# Altium PCB VESC_POWER_74mm.PcbDoc
Units mm, origin at the board's own origin, x right, y up, seen from the top; angles counter-clockwise.
Board outline 69 x 54 mm, 4 copper layers (Top Layer, Layer 1, Layer 2, Bottom Layer), stack 1.622 mm thick; 48 components, 17 nets, 111 pads, 1706 vias.
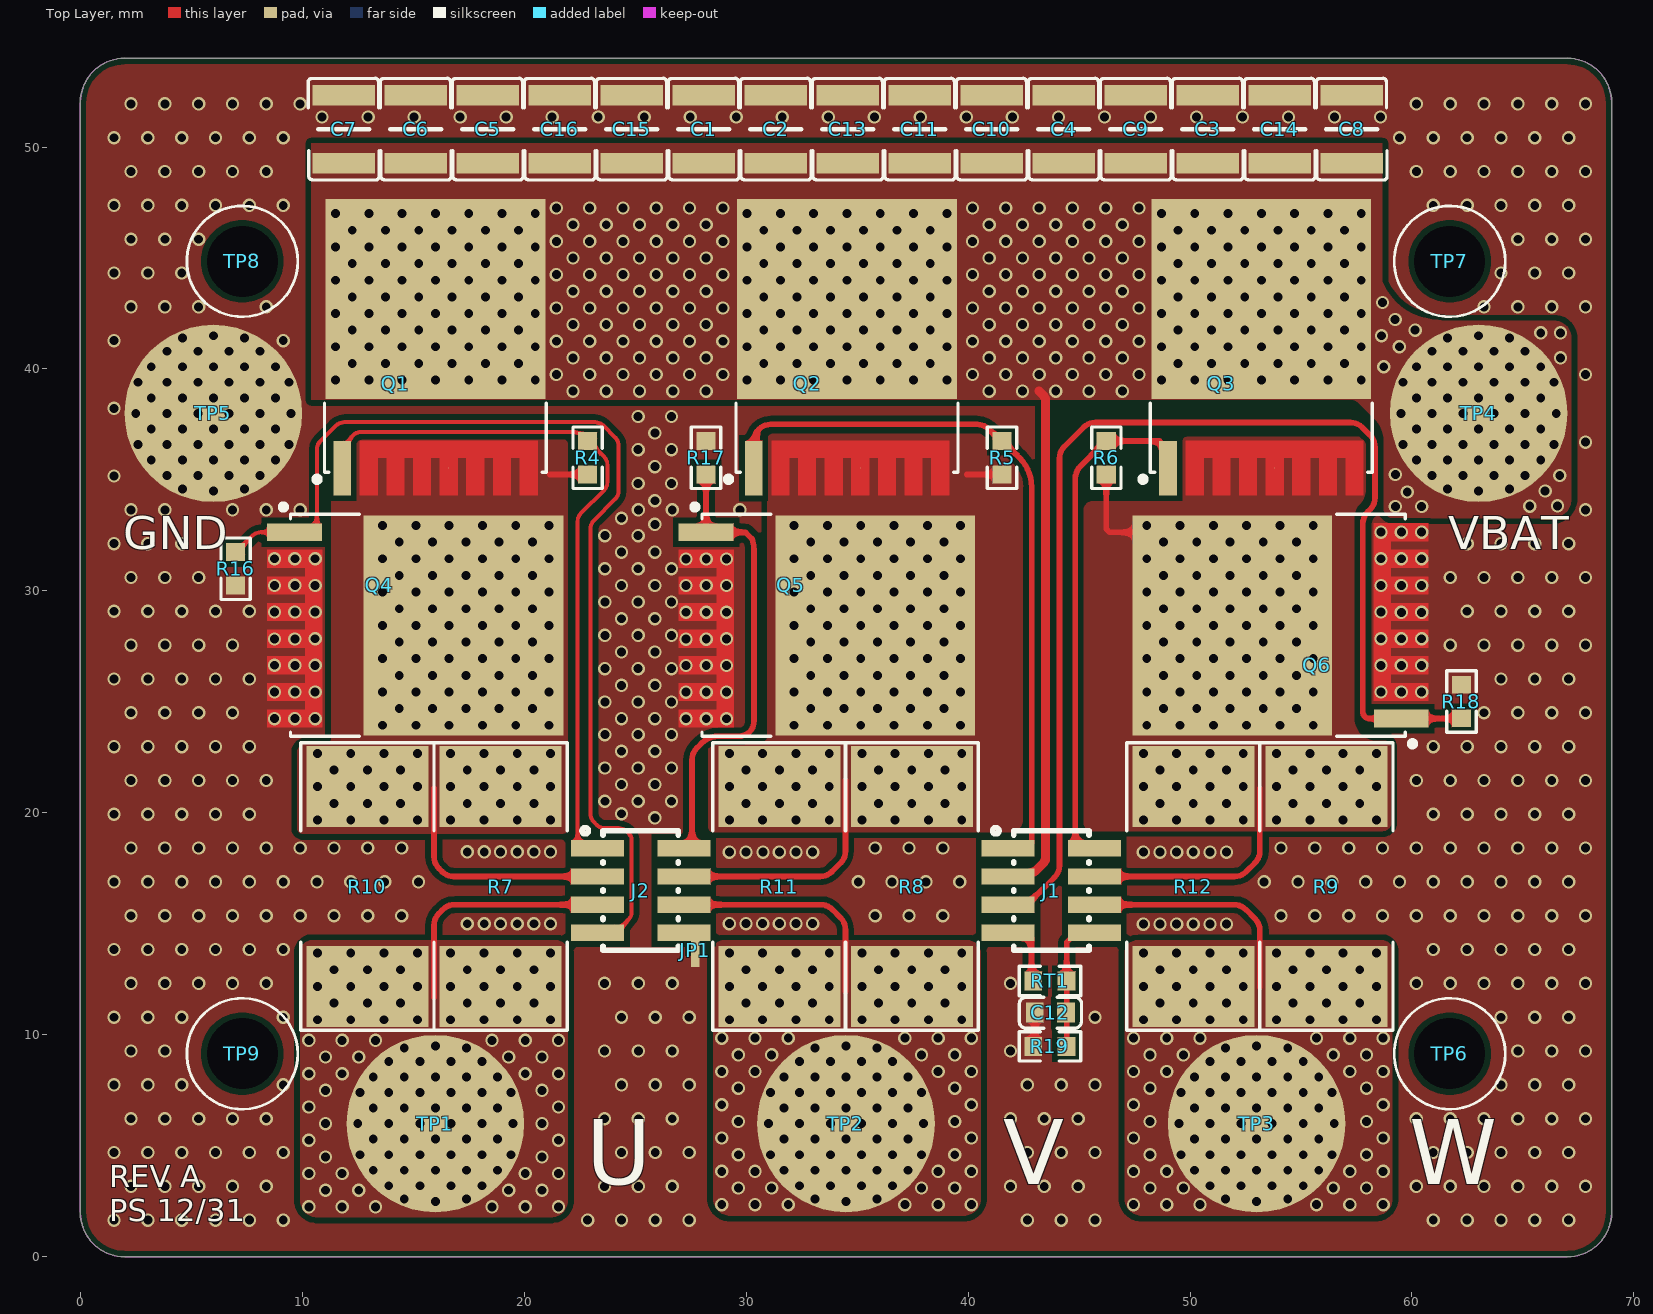
[diagram p0: Top Layer view]
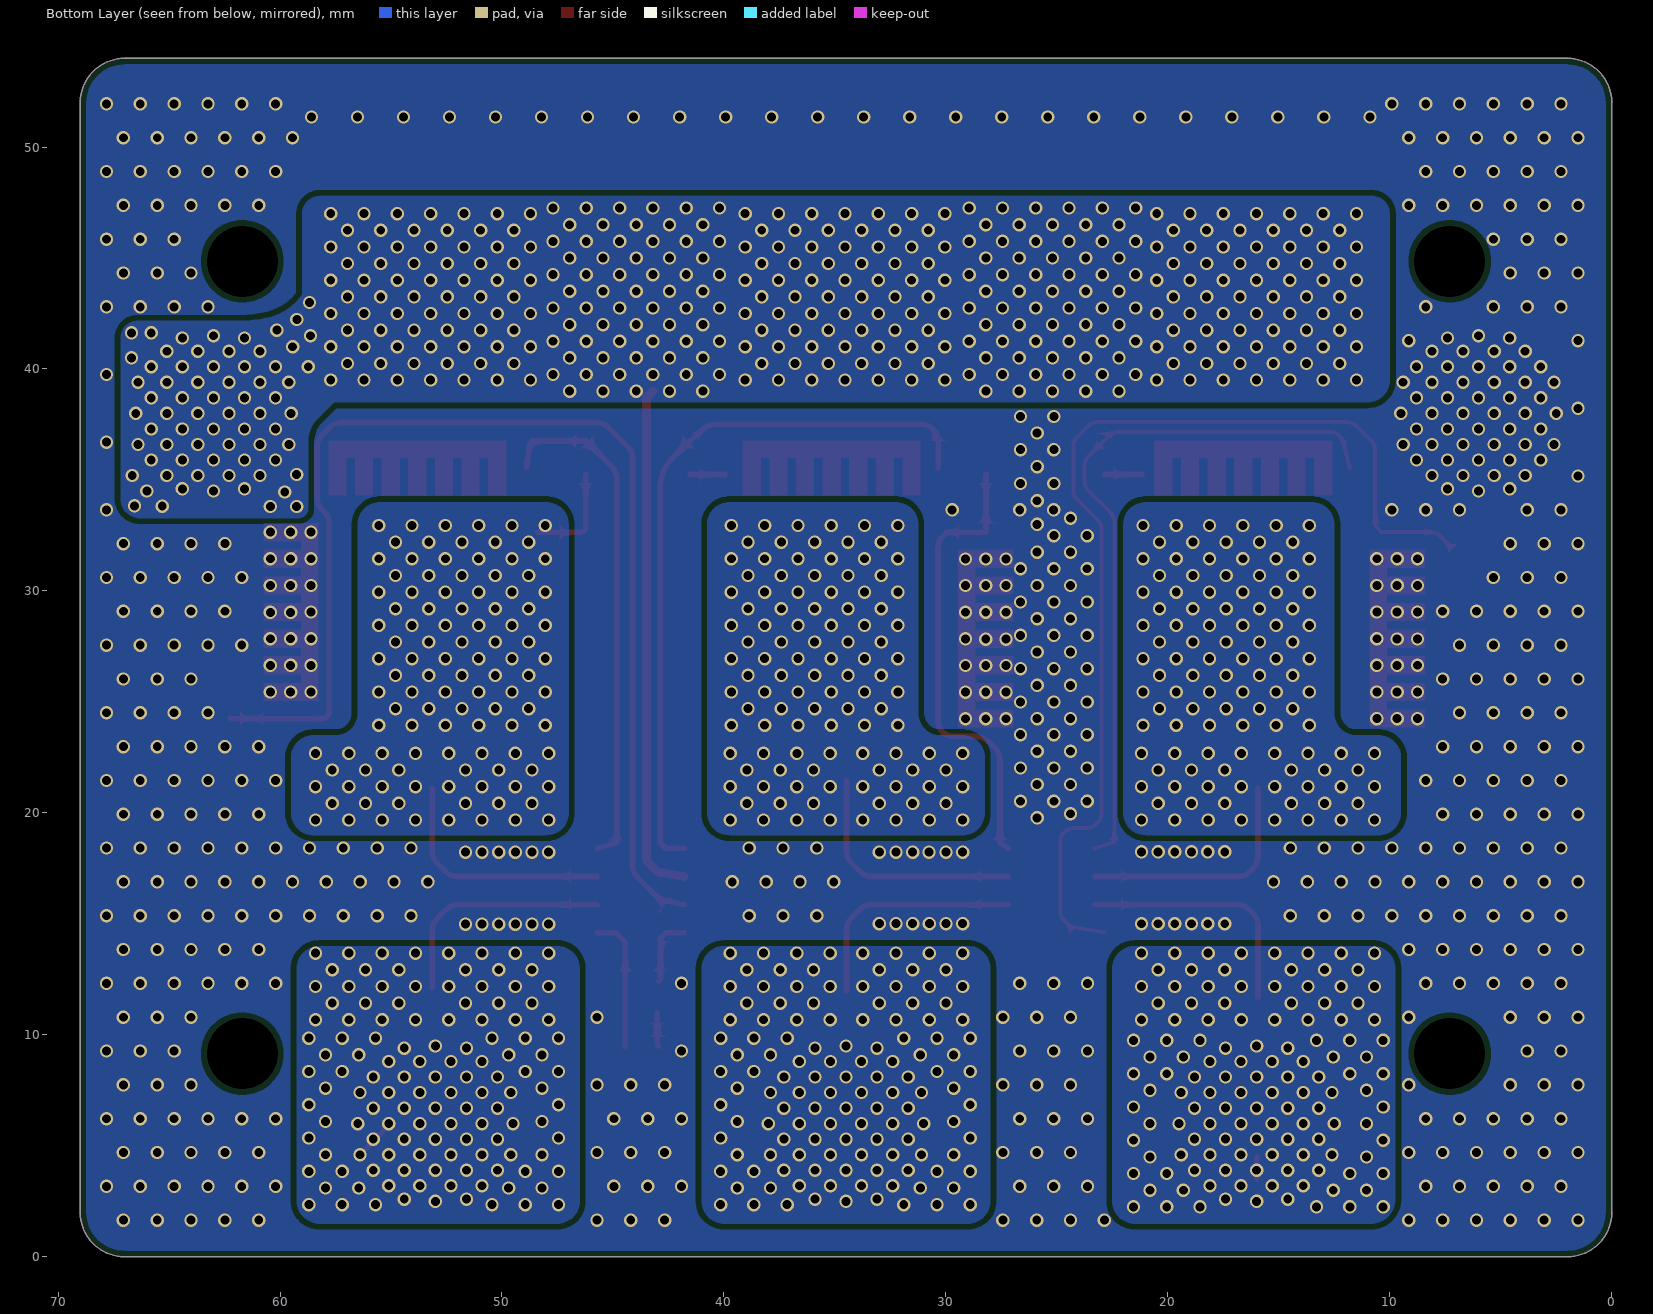
[diagram p1: Bottom Layer view, seen from below]
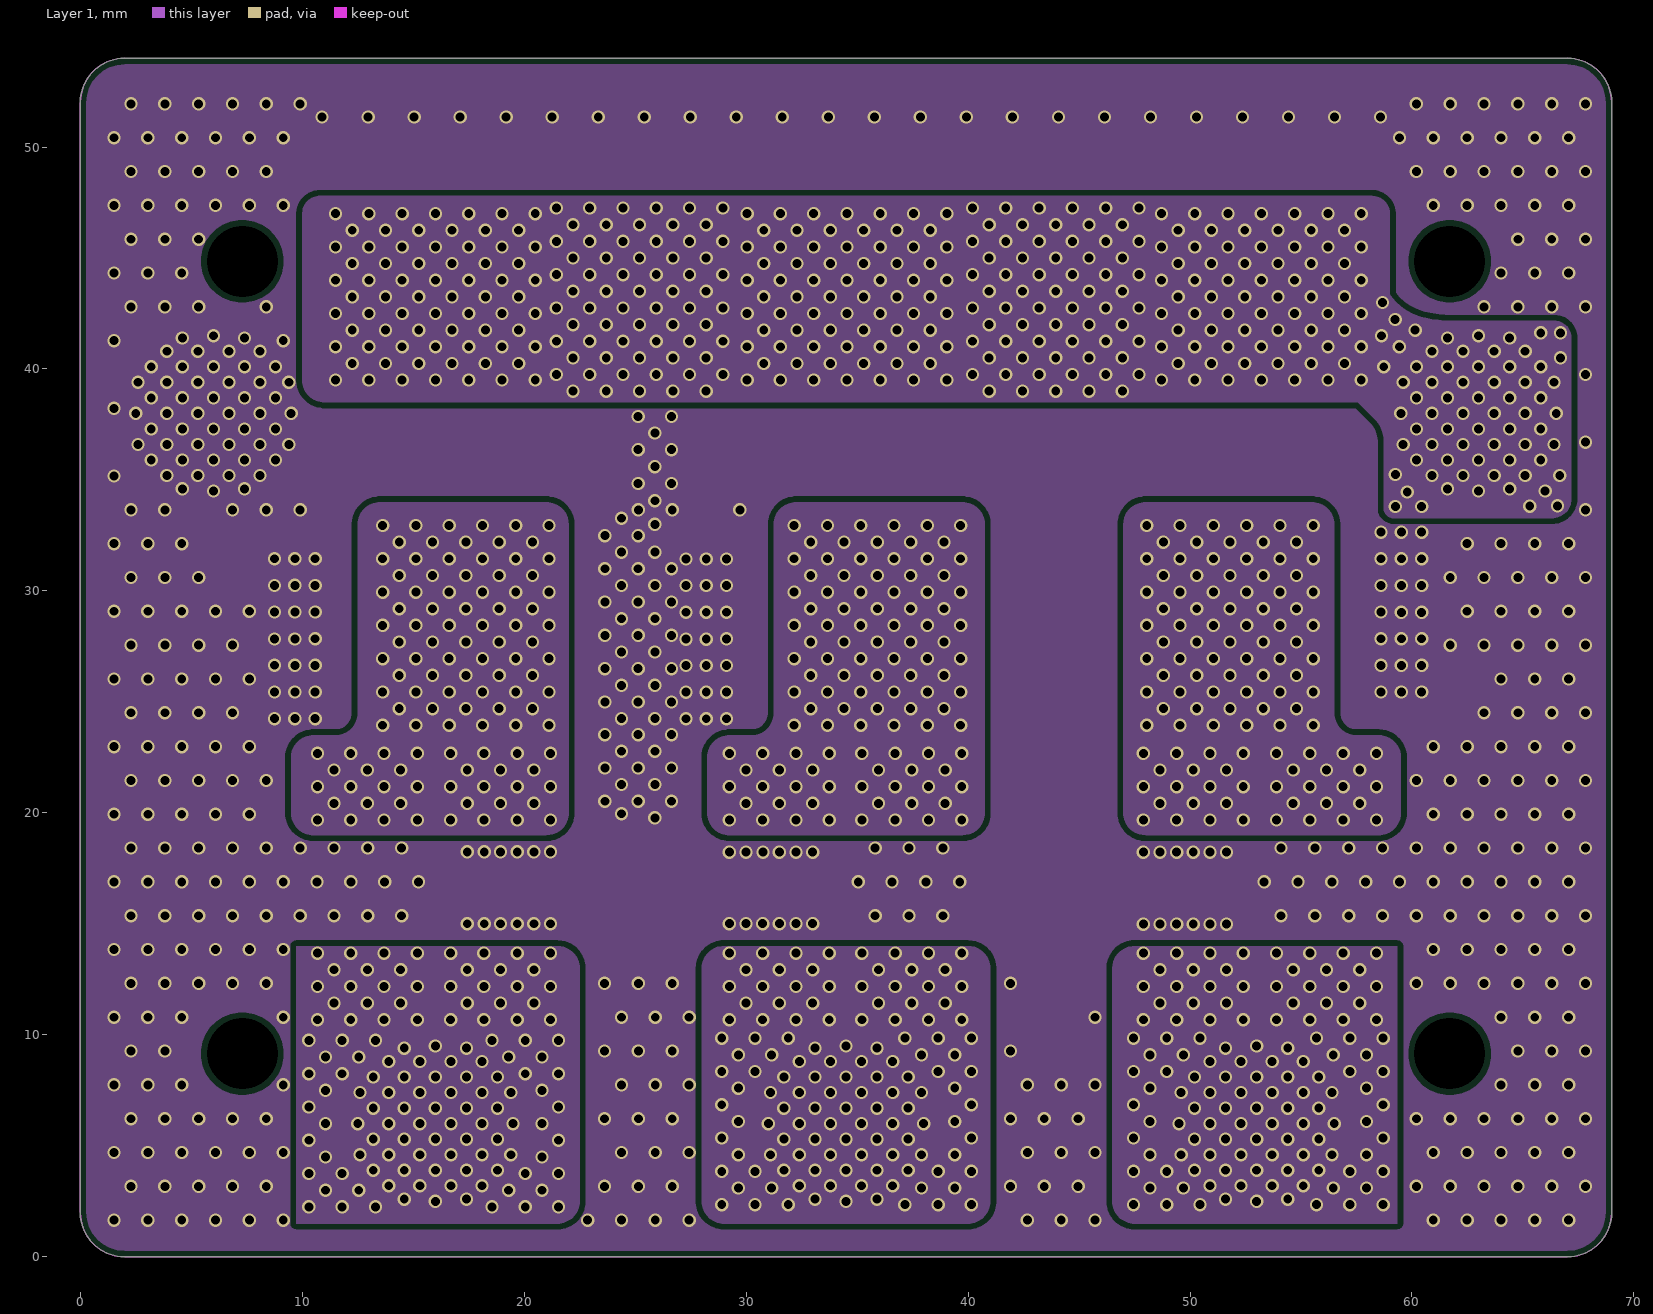
[diagram p2: Layer 1]
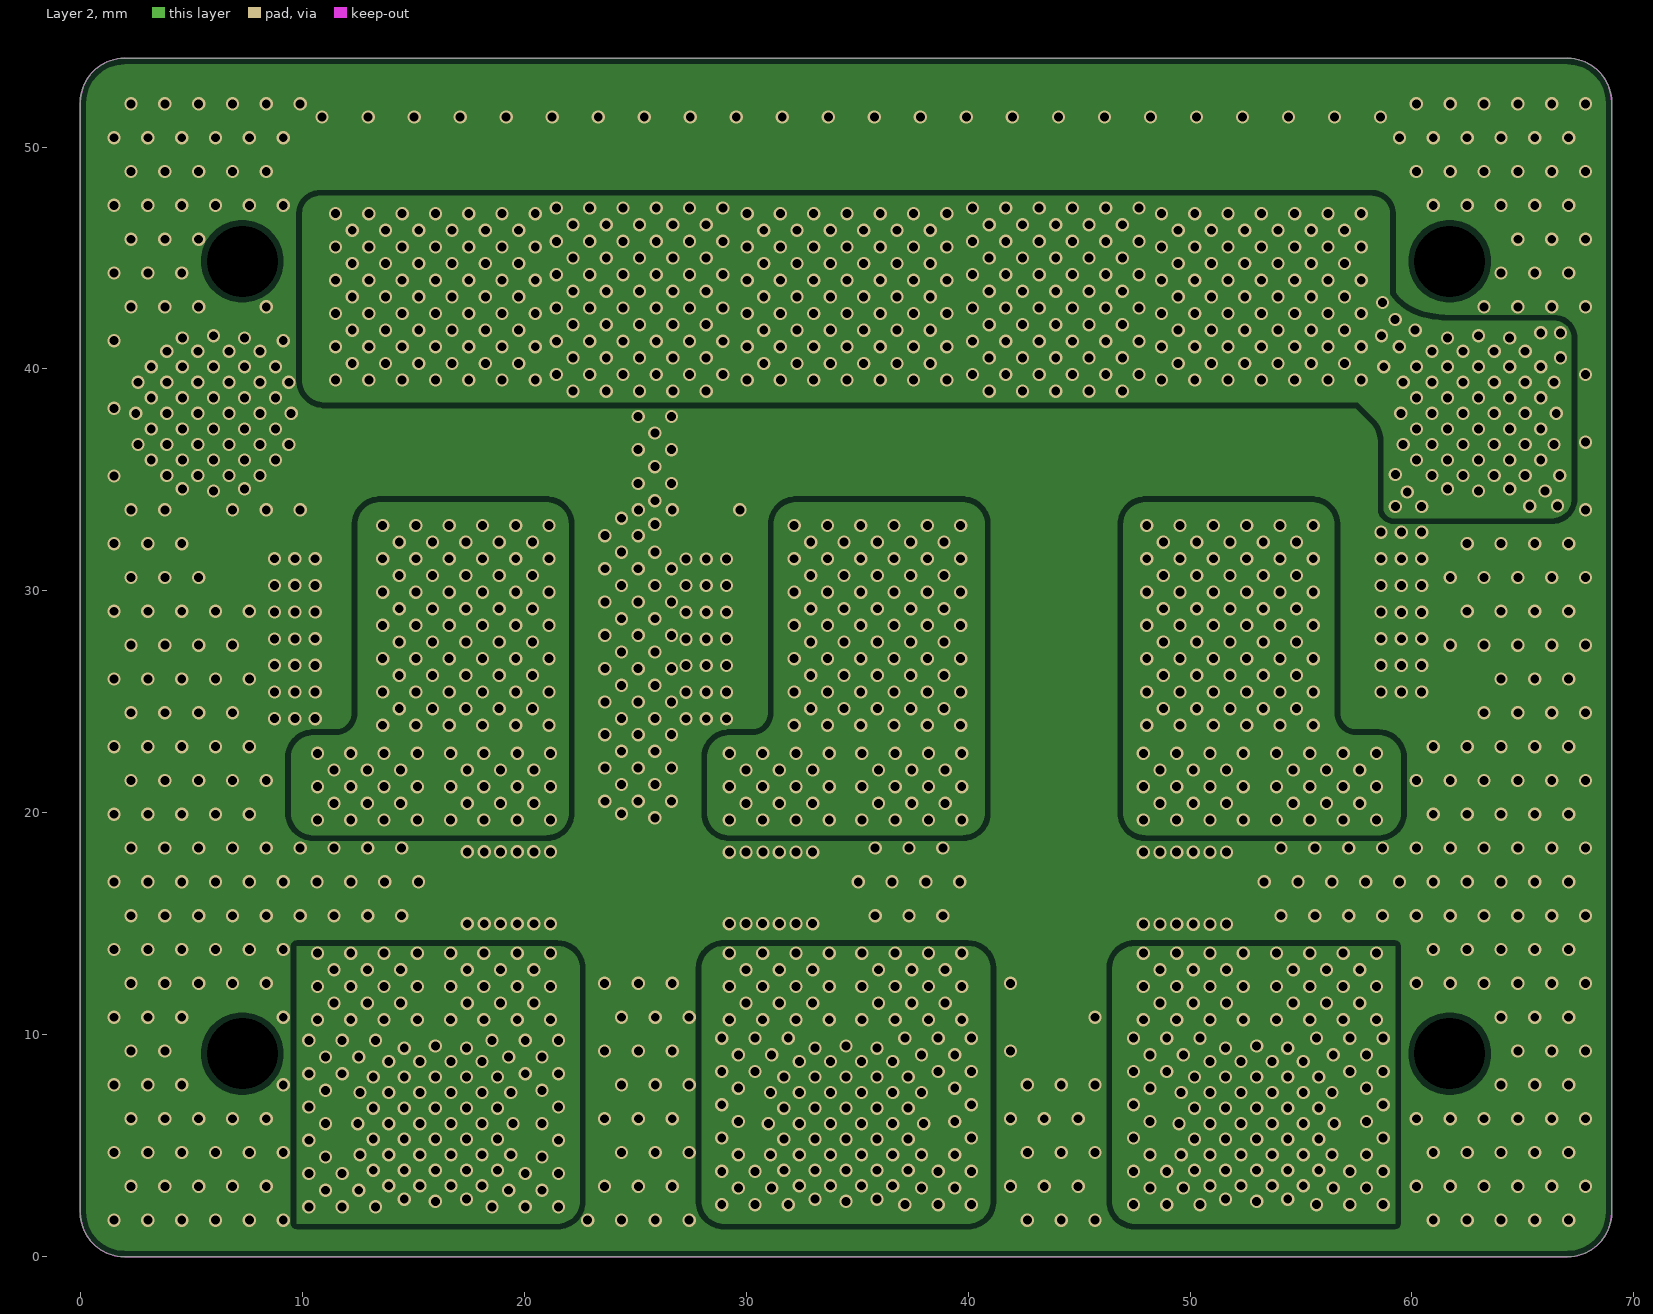
[diagram p3: Layer 2]
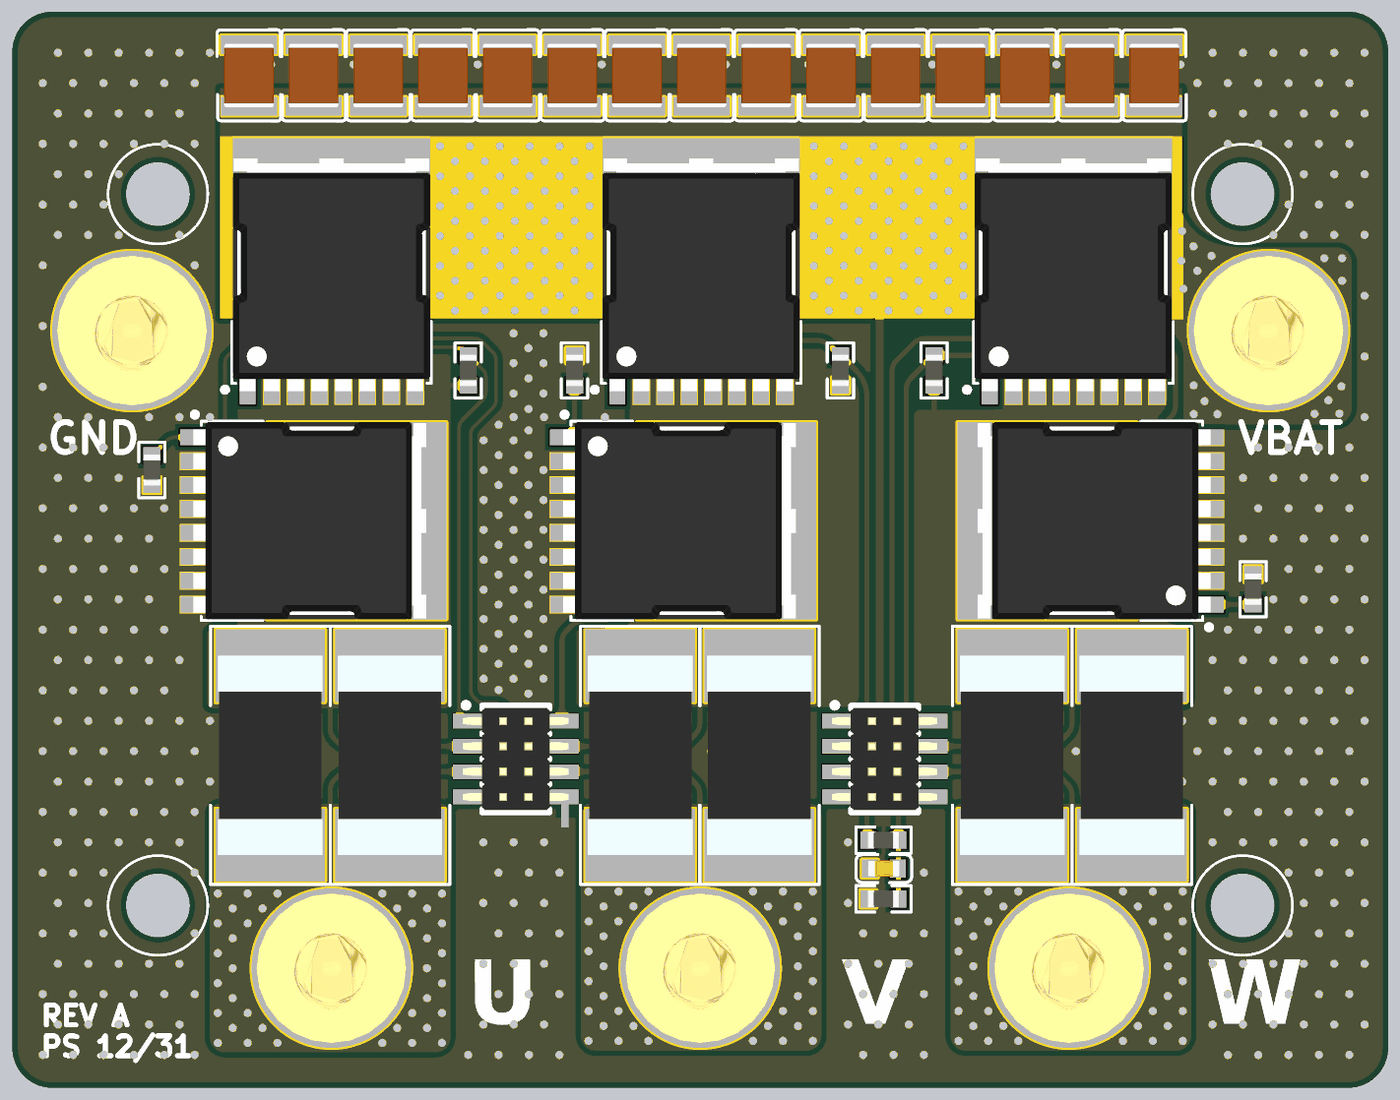
[diagram p4: 3D render of the assembled board from above, using the file's embedded part models]

## Layer stack, top to bottom
Top Solder: solder mask 0.0102, Solder Resist, Dk 3.5
Top Layer: signal copper 0.035
Dielectric 2: prepreg 0.2083, PP-022, Dk 4.5
Layer 1: signal copper 0.0175
Dielectric 1: core 1.1, Core-024, Dk 4.6
Layer 2: signal copper 0.0175
Dielectric 3: prepreg 0.2083, PP-022, Dk 4.5
Bottom Layer: signal copper 0.035
Bottom Solder: solder mask 0.0102, Solder Resist, Dk 3.5

## Board outline
0,2 ccw(c2,2) 2,0 67,0 ccw(c67,2) 69,2 69,52 ccw(c67,52) 67,54 2,54 ccw(c2,52) 0,52

## Design rules (kind name [scope] priority, off if disabled: settings)
BoardOutlineClearance [All] p1: gap=0.254 ignorepadtopadclearanceinfootprint=FALSE except(0: Arc-SplitContinuation Track-SplitContinuation SMDPad-SplitContinuation THPad-SplitContinuation Via-SplitContinuation Fill-SplitContinuation Poly-SplitContinuation Region-SplitContinuation Text-SplitContinuation)
Clearance [All] p1: gap=0.254 ignorepadtopadclearanceinfootprint=FALSE except(0.152: Arc-Hole Track-Hole SMDPad-Hole THPad-Hole Via-Hole Text-Hole)
HoleSize [All] p1: absolutevalues=TRUE maxlimit=5 minlimit=0.025 maxpercent=80.000 minpercent=20.000
HoleToHoleClearance [All] p1: gap=0.229 allowstackedmicrovias=TRUE
MinimumSolderMaskSliver [All] p1: minsoldermaskwidth=0.051
PolygonConnect [All] p1: connectstyle=Direct reliefconductorwidth=0.254 reliefentries=4 polygonreliefangle="90 Angle" airgapwidth=0.254
RoutingVias [All] p1: holewidth=0.711 width=1.27 viastyle="Through Hole" minholewidth=0.711 minwidth=1.27 maxholewidth=0.711 maxwidth=1.27
SilkToSilkClearance [All] p1: silktosilkclearance=0
SilkToSolderMaskClearance [IsPad] p1: minsilkscreentomaskgap=0.025 clearancetoexposedcopper=TRUE
SolderMaskExpansion [All] p1: expansion=0.102 istentingtop=FALSE
SupplyNets "Schematic Supply Nets_2" [InNet('GND')] p1: voltage=0.000
SupplyNets "Schematic Supply Nets_1" [InNet('3V3')] p2: voltage=0.000
SupplyNets "Schematic Supply Nets" [InNet('VIN')] p3: voltage=0.000
Width [All] p1: maxlimit=2.54 minlimit=0.152 preferedwidth=0.254
25 further rules are at their usual default settings.

## Components (designator, comment, footprint, x,y, rotation, side; value= is the part's Value field where it differs from the comment)
C1 "2.2uF/100V" CAPC3225X230N 28.084,50.8 r270 top
C2 "2.2uF/100V" CAPC3225X230N 31.327,50.8 r270 top
C3 "2.2uF/100V" CAPC3225X230N 50.79,50.8 r270 top
C4 "2.2uF/100V" CAPC3225X230N 44.302,50.8 r270 top
C5 "2.2uF/100V" CAPC3225X230N 18.352,50.8 r270 top
C6 "2.2uF/100V" CAPC3225X230N 15.109,50.8 r270 top
C7 "2.2uF/100V" CAPC3225X230N 11.865,50.8 r270 top
C8 "2.2uF/100V" CAPC3225X230N 57.277,50.8 r270 top
C9 "2.2uF/100V" CAPC3225X230N 47.546,50.8 r270 top
C10 "2.2uF/100V" CAPC3225X230N 41.058,50.8 r270 top
C11 "2.2uF/100V" CAPC3225X230N 37.815,50.8 r270 top
C12 "2.2uF/6.3V" C0603 43.708,10.998 r180 top
C13 "2.2uF/100V" CAPC3225X230N 34.571,50.8 r270 top
C14 "2.2uF/100V" CAPC3225X230N 54.033,50.8 r270 top
C15 "2.2uF/100V" CAPC3225X230N 24.84,50.8 r270 top
C16 "2.2uF/100V" CAPC3225X230N 21.596,50.8 r270 top
J1 "X6521WVS-2x04H-C60D74" HDR-SMD_8P-P1.27-V-M-C2-C4-LS5.3 43.75,16.5 r270 top locked
J2 "X6521WVS-2x04H-C60D74" HDR-SMD_8P-P1.27-V-M-C2-C4-LS5.3 25.25,16.5 r270 top locked
JP1 "Short" SHORT 27.705,13.82 r90 top
Q1 "NCEP023N10LL" TOLL 16.002,41 r90 top
Q2 "NCEP023N10LL" TOLL 34.544,41 r90 top
Q3 "NCEP023N10LL" TOLL 53.213,41 r90 top
Q4 "NCEP023N10LL" TOLL 15.122,28.448 r0 top
Q5 "NCEP023N10LL" TOLL 33.664,28.448 r0 top
Q6 "NCEP023N10LL" TOLL 54.05,28.448 r180 top
R4 "5.1K/1%" R0603 22.86,36 r90 top
R5 "5.1K/1%" R0603 41.529,36 r90 top
R6 "5.1K/1%" R0603 46.228,36 r90 top
R7 "1mR/1%" R3920 18.936,16.681 r90 top locked
R8 "1mR/1%" R3920 37.465,16.681 r90 top locked
R9 "1mR/1%" R3920 56.147,16.681 r90 top locked
R10 "1mR/1%" R3920 12.936,16.681 r90 top locked
R11 "1mR/1%" R3920 31.496,16.681 r90 top locked
R12 "1mR/1%" R3920 50.147,16.681 r90 top locked
R16 "5.1K/1%" R0603 7,31 r90 top
R17 "5.1K/1%" R0603 28.194,36 r270 top
R18 "5.1K/1%" R0603 62.23,25.019 r270 top
R19 "10K/1%" R0603 43.688,9.482 r0 top
RT1 "NTC" R0603 43.688,12.427 r0 top
TP1 "PHA" TP_8X8 16,6 r0 top
TP2 "PHB" TP_8X8 34.5,6 r0 top
TP3 "PHC" TP_8X8 53,6 r0 top
TP4 "GND" TP_8X8 63,38 r0 top
TP5 "VIN" TP_8X8 6,38 r0 top
TP6 "TEST POINT" HOLE-3.2MM_M 61.7,9.15 r0 top locked
TP7 "TEST POINT" HOLE-3.2MM_M 61.7,44.85 r0 top
TP8 "TEST POINT" HOLE-3.2MM_M 7.3,44.85 r0 top
TP9 "TEST POINT" HOLE-3.2MM_M 7.3,9.15 r0 top

## Footprints (in the part's own frame and the unit in brackets; to place one, negate y for a bottom-side part, rotate by r counter-clockwise, add the part's x,y. Pads: shape width x height; smd on the part's side, far side on the other; paste and mask are expansions set on the pad)
C0603 [mm] "C0603"
  rect 0.8x0.9 smd: 1(-0.7,0) 2(0.7,0)
  silkscreen extent -1.41,-0.7 1.4,0.7, body extent -0.8,-0.41 0.8,0.41, height 0.9
CAPC3225X230N [mm]
  rect 0.92x2.82 smd: 1(-1.54,0) 2(1.54,0)
  silkscreen extent -2.3,-1.6 2.28,1.6, body extent -1.6,-1.25 1.6,1.25, height 2.47
HDR-SMD_8P-P1.27-V-M-C2-C4-LS5.3 [mm]
  rect 0.74x2.4 smd paste+0 mask+0.05: 1(-1.905,-1.95) 2(-1.905,1.95) 3(-0.635,-1.95) 4(-0.635,1.95) 5(0.635,-1.95) 6(0.635,1.95) 7(1.905,-1.95) 8(1.905,1.95)
  silkscreen extent -2.84,-2.64 2.69,1.7, body extent -2.54,-2.65 2.54,2.65, height 5.5
HOLE-3.2MM_M [mm]
  round 0 hole 3.2 unplated: 1(0,0)
  silkscreen extent -2.5,-2.5 2.5,2.5
R0603 [mm] "R0603"
  rect 0.806x0.864 smd: 1(-0.753,0) 2(0.753,0)
  silkscreen extent -1.38,-0.66 1.39,0.66, body extent -0.79,-0.43 0.79,0.43, height 0.5
R3920 [mm] "R3920"
  rect 3.65x5.5 smd: 1(-4.5,0) 2(4.5,0)
  silkscreen extent -6.48,-3 6.48,3, body extent -5,-2.63 5,2.63, height 1.37
SHORT [mil] "SHORT"
  rect 30x15 smd mask+0: 1(-14.9,0)
  rect 30x15 smd paste+0 mask+0: 2(14.9,0)
TOLL [mm] "TOLL"
  rect 2.463x0.8 smd: 1(-5.469,4.2)
  rect 9x9.9 smd: 2(2.15,0)
  oct 0.025x0.025 smd: 3(-5.46,-0.6)
  round 0.025 smd: 3(-5.46,-0.6)
  Top Layer region: -6.691,3.4 -4.228,3.4 -4.228,-4.6 -6.691,-4.6 -6.691,-3.8 -4.991,-3.8 -4.991,-3.4 -6.691,-3.4 -6.691,-2.6 -4.991,-2.6 -4.991,-2.2 -6.691,-2.2 -6.691,-1.4 -4.991,-1.4 -4.991,-1 -6.691,-1 -6.691,-0.2 -4.991,-0.2 -4.991,0.2 -6.691,0.2 -6.691,1 -4.991,1 -4.991,1.4 -6.691,1.4 -6.691,2.2 -4.991,2.2 -4.991,2.6 -6.691,2.6
  silkscreen extent -6.1,-5 -2.55,5.46, body extent -6.04,-4.95 5.63,4.95, height 2.3
TP_8X8 [mm] "TP_8X8"
  round 8 smd: 1(0,0)
  body extent -3.75,-3.75 3.74,3.75, height 23

## Part data
C1 C2 C3 C4 C5 C6 C7 C8 C9 C10 C11 C12 C13 C14 C15 C16: library part "CAP NP"
  C1 C2 C3 C4 C5 C6 C7 C8 C9 C10 C11 C13 C14 C15 C16: PCB Footprint=C1206
  C12: PCB Footprint=C0603
J1 J2: Color=黑色, Current Rating (Max)=3A, JLCPCB Part Class="Extended Part", LCSC Part Name="2x4P 间距:2.54mm 方针", Manufacturer="XKB Connection(中国星坤)", Operating Temperature Range=-40℃~+105℃, Soldering Temperature(Max)=260℃, Voltage Rating (Max)=250V, Add into BOM=yes, Circluar Pins/Square Pins=方针, Contact Material=黄铜, Contact Plating=金, Convert to PCB=yes, Datasheet=https://atta.szlcsc.com/upload/public/pdf/source/20211009/E3239EE5247E6BAFECB8B74A4FCF9AB8.pdf, Device=X6521WVS-2x04H-C60D74, Insulation Height=2.5mm, Length of End Connection Pin=-, Length of Mating Pin=-, Manufacturer Part=X6521WVS-2x04H-C60D74, Mounting Type=-, Number of Pins=8P, Number of Rows=双排, Pin Structure=2x4P, Pitch=2.54mm, Row Spacing=2.54mm, Supplier=LCSC, Supplier Footprint=SMD,P=2.54mm, Supplier Part=C780053, Symbol=X6521WVS-2*04H-C60D74
JP1: library part SHORT, "2 PIN SHORTED TO CONNECT DIFFERENT NETS", CLASS=DISCRETE, PART_NUMBER=TMP-442
Q1 Q2 Q3 Q4 Q5 Q6: library part "MOSFET N", PCB Footprint=TOLL
R4 R5 R6 R7 R8 R9 R10 R11 R12 R16 R17 R18 R19: library part RESISTOR
  R4 R5 R6 R16 R17 R18 R19: PCB Footprint=R0603
  R7 R8 R9 R10 R11 R12: PCB Footprint=R3920
TP1 TP2 TP3 TP4 TP5: library part "TEST POINT", PCB Footprint=TP_8x8
RT1: PCB Footprint=R0603

## Via types
v1: diameter 0.6, hole 0.4, Top Layer to Bottom Layer, tented both sides, 1706 vias

## Nets (pads, with @x,y where several pads share a name; then routed paths per layer and width w, separated by ;. In a path a pad name is that pad's centre, name@x,y a point inside that pad or via, vN(x,y) a via of type N, cw(c..) or ccw(c..) an arc to the next point about the centre after c; other vN are vias at no path point)
3V3: J1.7 RT1.1 | length 3.1
  Top Layer w0.254: J1.7 42.613,14.595 42.856,14.352 42.856,12.506 RT1.1
ADC_TEMP: C12.1 J1.8 R19.2 RT1.2 | length 6.1
  Top Layer w0.254: R19.2 44.441,10.998 RT1.2 44.441,14.166 44.87,14.595 J1.8
GHA: J2.1 Q1.1 R4.2 | length 32.2
  Top Layer w0.178: Q1.1 12.085,36.674 12.091,36.699 cw(c12.61,36.57) 12.231,36.947 12.295,37.011 cw(c12.673,36.633) 12.673,37.167 22.196,37.167 cw(c22.196,36.633) 22.446,37.105 22.517,37.067 22.889,36.753 23.203,36.439 23.593,36.049 cw(c23.215,35.672) 23.749,35.672 23.749,34.911 cw(c23.215,34.911) 23.593,34.534 22.565,33.506 ccw(c22.943,33.128) 22.409,33.128 22.409,18.686 J2.1
GHB: J1.1 Q2.1 R5.2 | length 32.8
  Top Layer w0.254: Q2.1 30.344,36.74 cw(c31.106,36.74) 31.106,37.502 40.407,37.502 cw(c40.407,36.74) 40.919,37.305 41.224,37.029 R5.2 41.834,36.477 42.322,35.989 cw(c41.015,34.683) 42.862,34.683 42.862,18.648 42.619,18.405 J1.1
GHC: J1.2 Q3.1 R6.2 | length 23.2
  Top Layer w0.254: J1.2 44.831,18.648 44.831,35.069 cw(c45.593,35.069) 45.054,35.608 R6.2@46.228,36.782 ; R6.2 48.622,36.753 48.74,36.635 Q3.1@48.895,35.56
GLA: J2.7 Q4.1 R16.2 | length 47.1
  Top Layer w0.178: R16.2@7.28,32.004 7.769,32.493 cw(c8.145,32.115) 8.145,32.648 10.391,32.648 10.664,32.959 10.664,36.37 cw(c11.197,36.37) 10.819,36.746 11.52,37.446 cw(c11.896,37.068) 11.896,37.602 23.192,37.602 cw(c23.192,37.068) 23.569,37.446 24.101,36.913 cw(c23.724,36.537) 24.257,36.537 24.257,34.511 cw(c23.724,34.511) 24.102,34.135 23.142,33.175 ccw(c23.52,32.799) 22.987,32.799 22.987,19.962 ccw(c23.52,19.962) 23.142,19.586 23.261,19.467 ccw(c23.637,19.846) 23.637,19.313 24.259,19.313 cw(c24.259,18.779) 24.636,19.157 24.687,19.105 cw(c24.31,18.729) 24.784,18.973 24.805,18.932 cw(c24.5,18.775) 24.843,18.775 24.843,15.495 cw(c24.5,15.495) 24.773,15.288 24.735,15.237 cw(c24.31,15.559) 24.705,15.201 24.411,14.876 J2.7@22.86,14.605
GLB: J2.2 Q5.1 R17.2 | length 20.9
  Top Layer w0.254: J2.2 27.559,18.648 27.559,22.39 cw(c28.321,22.39) 27.782,22.929 27.987,23.134 cw(c28.77,22.35) 28.77,23.458 29.689,23.458 ccw(c29.689,24.122) 30.353,24.142 30.353,31.877 ccw(c29.591,31.877) 30.336,32.037 30.271,32.34 29.972,32.639 Q5.1@28.194,32.639 ; Q5.1 R17.2
GLC: J1.5 Q6.1 R18.2 | length 53.8
  Top Layer w0.254: J1.5 42.873,16.108 42.905,16.108 43.894,17.097 ccw(c43.355,17.635) 44.117,17.635 44.117,35.966 cw(c44.879,35.966) 44.339,36.504 45.204,37.369 cw(c45.743,36.83) 45.743,37.592 57.218,37.592 cw(c57.218,36.83) 57.756,37.369 58.113,37.013 cw(c57.574,36.474) 58.336,36.474 58.336,34.212 cw(c57.574,34.212) 58.113,33.673 58.008,33.569 ccw(c58.547,33.03) 57.785,33.03 57.785,24.552 ccw(c58.089,24.552) 58.089,24.248 61.925,24.248 R18.2@62.23,24.257
GND: C1.1 C2.1 C3.1 C4.1 C5.1 C6.1 C7.1 C8.1 C9.1 C10.1 C11.1 C12.2 C13.1 C14.1 C15.1 C16.1 JP1.1 Q4.3 Q5.3 Q6.3 R16.1 R17.1 R18.1 R19.1 TP5.1 | length 2.5
  Top Layer w0.254: v1@9.75,31.448 v1@10.664,31.448 ; R19.1 43.008,9.555 C12.2
  other v1: 1.524,1.651 3.048,1.651 4.572,1.651 6.096,1.651 7.62,1.651 9.144,1.651 22.86,1.651 24.384,1.651 25.908,1.651 27.432,1.651 42.672,1.651 44.196,1.651 45.72,1.651 60.96,1.651 62.484,1.651 64.008,1.651 65.532,1.651 67.056,1.651 2.286,3.175 3.81,3.175 5.334,3.175 6.858,3.175 8.382,3.175 23.622,3.175 25.146,3.175 26.67,3.175 41.91,3.175 43.434,3.175 44.958,3.175 60.198,3.175 61.722,3.175 63.246,3.175 64.77,3.175 66.294,3.175 67.818,3.175 1.524,4.699 3.048,4.699 4.572,4.699 6.096,4.699 7.62,4.699 9.144,4.699 24.384,4.699 25.908,4.699 27.432,4.699 42.672,4.699 44.196,4.699 45.72,4.699 60.96,4.699 62.484,4.699 64.008,4.699 65.532,4.699 67.056,4.699 2.286,6.223 3.81,6.223 5.334,6.223 6.858,6.223 8.382,6.223 23.622,6.223 25.146,6.223 26.67,6.223 41.91,6.223 43.434,6.223 44.958,6.223 60.198,6.223 61.722,6.223 63.246,6.223 64.77,6.223 66.294,6.223 67.818,6.223 1.524,7.747 3.048,7.747 4.572,7.747 9.144,7.747 24.384,7.747 25.908,7.747 27.432,7.747 42.672,7.747 44.196,7.747 45.72,7.747 64.008,7.747 65.532,7.747 67.056,7.747 2.286,9.271 3.81,9.271 23.622,9.271 25.146,9.271 26.67,9.271 41.91,9.271 64.77,9.271 66.294,9.271 67.818,9.271 1.524,10.795 3.048,10.795 4.572,10.795 9.144,10.795 24.384,10.795 25.908,10.795 27.432,10.795 45.72,10.795 64.008,10.795 65.532,10.795 67.056,10.795 2.286,12.319 3.81,12.319 5.334,12.319 6.858,12.319 8.382,12.319 23.622,12.319 25.146,12.319 26.67,12.319 41.91,12.319 60.198,12.319 61.722,12.319 63.246,12.319 64.77,12.319 66.294,12.319 67.818,12.319 1.524,13.843 3.048,13.843 4.572,13.843 6.096,13.843 7.62,13.843 9.144,13.843 60.96,13.843 62.484,13.843 64.008,13.843 65.532,13.843 67.056,13.843 47.897,14.988 48.647,14.988 49.397,14.988 50.147,14.988 50.897,14.988 51.647,14.988 17.436,15.004 18.2,15.004 18.936,15.004 19.686,15.004 20.436,15.004 21.186,15.004 29.246,15.011 29.996,15.011 30.746,15.011 31.496,15.011 32.246,15.011 32.996,15.011 2.286,15.367 3.81,15.367 5.334,15.367 6.858,15.367 8.382,15.367 9.906,15.367 11.43,15.367 12.954,15.367 14.478,15.367 35.814,15.367 37.338,15.367 38.862,15.367 54.102,15.367 55.626,15.367 57.15,15.367 58.674,15.367 60.198,15.367 61.722,15.367 63.246,15.367 64.77,15.367 66.294,15.367 67.818,15.367 1.524,16.891 3.048,16.891 4.572,16.891 6.096,16.891 7.62,16.891 9.144,16.891 10.668,16.891 12.192,16.891 13.716,16.891 15.24,16.891 35.052,16.891 36.576,16.891 38.1,16.891 39.624,16.891 53.34,16.891 54.864,16.891 56.388,16.891 57.912,16.891 59.436,16.891 60.96,16.891 62.484,16.891 64.008,16.891 65.532,16.891 67.056,16.891 17.436,18.243 18.2,18.243 18.936,18.243 19.686,18.243 20.436,18.243 21.186,18.243 29.246,18.232 29.996,18.232 30.76,18.232 31.496,18.232 32.246,18.232 32.996,18.232 47.897,18.232 48.647,18.232 49.397,18.232 50.147,18.232 50.897,18.232 51.647,18.232 2.286,18.415 3.81,18.415 5.334,18.415 6.858,18.415 8.382,18.415 9.906,18.415 11.43,18.415 12.954,18.415 14.478,18.415 35.814,18.415 37.338,18.415 38.862,18.415 54.102,18.415 55.626,18.415 57.15,18.415 58.674,18.415 60.198,18.415 61.722,18.415 63.246,18.415 64.77,18.415 66.294,18.415 67.818,18.415 25.887,19.776 1.524,19.939 3.048,19.939 4.572,19.939 6.096,19.939 7.62,19.939 60.96,19.939 62.484,19.939 64.008,19.939 65.532,19.939 67.056,19.939 24.387,19.962 23.637,20.526 25.137,20.526 26.637,20.526 24.387,21.276 25.887,21.276 2.286,21.463 3.81,21.463 5.334,21.463 6.858,21.463 8.382,21.463 60.198,21.463 61.722,21.463 63.246,21.463 64.77,21.463 66.294,21.463 67.818,21.463 23.637,22.026 25.137,22.026 26.637,22.026 24.387,22.776 25.887,22.776 1.524,22.987 3.048,22.987 4.572,22.987 6.096,22.987 7.62,22.987 60.96,22.987 62.484,22.987 64.008,22.987 65.532,22.987 67.056,22.987 23.637,23.526 25.137,23.526 26.637,23.526 27.291,24.242 28.206,24.242 29.12,24.242 8.753,24.248 9.667,24.248 10.581,24.248 24.387,24.248 25.887,24.248 2.286,24.511 3.81,24.511 5.334,24.511 6.858,24.511 63.246,24.511 64.77,24.511 66.294,24.511 67.818,24.511 23.637,24.998 25.137,24.998 26.637,24.998 8.753,25.448 9.667,25.448 10.581,25.448 27.291,25.442 28.206,25.442 29.12,25.442 58.608,25.448 59.522,25.448 60.437,25.448 24.387,25.748 25.887,25.748 1.524,26.035 3.048,26.035 4.572,26.035 6.096,26.035 7.62,26.035 64.008,26.035 65.532,26.035 67.056,26.035 23.637,26.498 25.137,26.498 26.637,26.498 8.753,26.653 9.667,26.648 10.581,26.648 27.291,26.642 28.206,26.642 29.12,26.642 58.608,26.648 59.522,26.648 60.437,26.648 24.387,27.248 25.887,27.248 2.286,27.559 3.81,27.559 5.334,27.559 6.858,27.559 61.722,27.559 63.246,27.559 64.77,27.559 66.294,27.559 67.818,27.559 8.753,27.835 9.667,27.835 10.581,27.848 27.291,27.829 28.206,27.829 29.12,27.842 58.608,27.848 59.522,27.848 60.437,27.848 23.637,27.998 25.137,27.998 26.637,27.998 24.387,28.748 25.887,28.748 27.291,29.042 28.206,29.042 29.12,29.042 59.522,29.035 60.437,29.035 8.753,29.048 9.667,29.048 10.581,29.048 58.608,29.048 1.524,29.083 3.048,29.083 4.572,29.083 6.096,29.083 7.62,29.083 62.484,29.083 64.008,29.083 65.532,29.083 67.056,29.083 23.637,29.498 25.137,29.498 26.637,29.498 8.753,30.248 9.667,30.254 10.581,30.248 24.387,30.248 25.887,30.248 27.291,30.242 28.206,30.248 29.12,30.242 58.608,30.248 59.522,30.248 60.437,30.248 2.286,30.607 3.81,30.607 5.334,30.607 61.722,30.607 63.246,30.607 64.77,30.607 66.294,30.607 67.818,30.607 23.637,30.998 25.137,30.998 26.637,30.998 8.753,31.448 9.667,31.448 10.581,31.448 27.291,31.442 28.206,31.442 29.12,31.442 58.608,31.448 59.522,31.448 60.437,31.448 24.387,31.748 25.887,31.748 1.524,32.131 3.048,32.131 4.572,32.131 62.484,32.131 64.008,32.131 65.532,32.131 67.056,32.131 23.637,32.49 25.137,32.49 58.608,32.648 59.522,32.648 60.437,32.648 25.887,32.998 24.387,33.278 2.286,33.655 3.81,33.655 6.858,33.655 8.382,33.655 9.906,33.655 25.146,33.655 26.67,33.655 29.718,33.655 67.818,33.655 25.887,34.063 6,34.5 4.6,34.6 7.4,34.6 25.137,34.842 26.637,34.842 1.524,35.179 3.9,35.2 5.3,35.2 6.7,35.2 8.1,35.2 25.887,35.602 3.2,35.9 4.6,35.9 6,35.9 7.4,35.9 8.8,35.9 25.137,36.365 26.637,36.365 2.6,36.6 3.9,36.6 5.3,36.6 6.7,36.6 8.1,36.6 9.4,36.6 67.818,36.703 25.887,37.117 3.2,37.3 4.6,37.3 6,37.3 7.4,37.3 8.8,37.3 25.137,37.861 26.637,37.861 2.5,38 3.9,38 5.3,38 6.7,38 8.1,38 9.5,38 1.524,38.227 3.2,38.7 4.6,38.7 6,38.7 7.4,38.7 8.8,38.7 2.6,39.4 3.9,39.4 5.3,39.4 6.7,39.4 8.1,39.4 9.4,39.4 67.818,39.751 3.2,40.1 4.6,40.1 6,40.1 7.4,40.1 8.8,40.1 3.9,40.8 5.3,40.8 6.7,40.8 8.1,40.8 1.524,41.275 9.144,41.275 4.6,41.4 7.4,41.4 6,41.5 2.286,42.799 3.81,42.799 5.334,42.799 8.382,42.799 63.246,42.799 64.77,42.799 66.294,42.799 67.818,42.799 1.524,44.323 3.048,44.323 4.572,44.323 64.008,44.323 65.532,44.323 67.056,44.323 2.286,45.847 3.81,45.847 5.334,45.847 64.77,45.847 66.294,45.847 67.818,45.847 1.524,47.371 3.048,47.371 4.572,47.371 6.096,47.371 7.62,47.371 9.144,47.371 60.96,47.371 62.484,47.371 64.008,47.371 65.532,47.371 67.056,47.371 2.286,48.895 3.81,48.895 5.334,48.895 6.858,48.895 8.382,48.895 60.198,48.895 61.722,48.895 63.246,48.895 64.77,48.895 66.294,48.895 67.818,48.895 1.524,50.419 3.048,50.419 4.572,50.419 6.096,50.419 7.62,50.419 9.144,50.419 59.436,50.419 60.96,50.419 62.484,50.419 64.008,50.419 65.532,50.419 67.056,50.419 10.896,51.352 12.969,51.352 15.042,51.352 17.116,51.352 19.189,51.352 21.263,51.352 23.336,51.352 25.41,51.352 27.483,51.352 29.556,51.352 31.63,51.352 33.703,51.352 35.777,51.352 37.85,51.352 39.923,51.352 41.997,51.352 44.07,51.352 46.144,51.352 48.217,51.352 50.291,51.352 52.364,51.352 54.437,51.352 56.511,51.352 58.584,51.352 2.286,51.943 3.81,51.943 5.334,51.943 6.858,51.943 8.382,51.943 9.906,51.943 60.198,51.943 61.722,51.943 63.246,51.943 64.77,51.943 66.294,51.943 67.818,51.943
NetJ2_8: J2.8 JP1.2
PHA: J2.5 R7.1 R10.1 TP1.1 | length 11.6
  Top Layer w0.254: 15.938,11.699 15.938,14.935 cw(c16.7,14.935) 16.161,15.474 16.33,15.642 cw(c16.868,15.103) 16.868,15.865 J2.5 ; TP1.1@16,3.5 TP1.1@16,3.75 ; TP1.1@16,4.25 TP1.1@16,4.5
  other v1: 10.3,2.25 11.8,2.25 13.3,2.25 18.55,2.25 20.05,2.25 21.55,2.25 16,2.5 14.6,2.6 17.4,2.6 11.05,3 12.55,3 19.3,3 20.8,3 13.9,3.2 15.3,3.2 16.7,3.2 18.1,3.2 10.3,3.75 11.8,3.75 20.05,3.75 21.55,3.75 13.2,3.9 14.6,3.9 16,3.9 17.4,3.9 18.8,3.9 11.05,4.5 20.8,4.5 12.6,4.6 13.9,4.6 15.3,4.6 16.7,4.6 18.1,4.6 19.4,4.6 10.3,5.25 21.55,5.25 13.2,5.3 14.6,5.3 16,5.3 17.4,5.3 18.8,5.3 11.05,6 12.5,6 13.9,6 15.3,6 16.7,6 18.1,6 19.5,6 20.8,6 13.2,6.7 14.6,6.7 16,6.7 17.4,6.7 18.8,6.7 10.3,6.75 21.55,6.75 12.6,7.4 13.9,7.4 15.3,7.4 16.7,7.4 18.1,7.4 19.4,7.4 11.05,7.5 20.8,7.5 13.2,8.1 14.6,8.1 16,8.1 17.4,8.1 18.8,8.1 10.3,8.25 11.8,8.25 20.05,8.25 21.55,8.25 13.9,8.8 15.3,8.8 16.7,8.8 18.1,8.8 11.05,9 12.55,9 19.3,9 20.8,9 14.6,9.4 17.4,9.4 16,9.5 10.3,9.75 11.8,9.75 13.3,9.75 18.55,9.75 20.05,9.75 21.55,9.75 10.686,10.681 12.186,10.681 13.686,10.681 15.186,10.681 16.686,10.681 18.186,10.681 19.686,10.681 21.186,10.681 11.436,11.431 12.936,11.431 14.436,11.431 17.436,11.431 18.936,11.431 20.436,11.431 10.686,12.181 12.186,12.181 13.686,12.181 15.186,12.181 16.686,12.181 18.186,12.181 19.686,12.181 21.186,12.181 11.436,12.931 12.936,12.931 14.436,12.931 17.436,12.931 18.936,12.931 20.436,12.931 10.686,13.681 12.186,13.681 13.686,13.681 15.186,13.681 16.686,13.681 18.186,13.681 19.686,13.681 21.186,13.681
PHB: J2.6 R8.1 R11.1 TP2.1 | length 10.6
  Top Layer w0.254: J2.6 33.349,15.865 cw(c33.349,15.103) 33.888,15.642 34.256,15.274 cw(c33.717,14.735) 34.479,14.735 34.479,11.961
  other v1: 28.9,2.35 30.4,2.35 31.9,2.35 37.15,2.35 38.65,2.35 40.15,2.35 34.5,2.5 33.1,2.6 35.9,2.6 29.65,3.1 31.15,3.1 37.9,3.1 39.4,3.1 32.4,3.2 33.8,3.2 35.2,3.2 36.6,3.2 28.9,3.85 30.4,3.85 38.65,3.85 40.15,3.85 31.7,3.9 33.1,3.9 34.5,3.9 35.9,3.9 37.3,3.9 29.65,4.6 31.1,4.6 32.4,4.6 33.8,4.6 35.2,4.6 36.6,4.6 37.9,4.6 39.4,4.6 31.7,5.3 33.1,5.3 34.5,5.3 35.9,5.3 37.3,5.3 28.9,5.35 40.15,5.35 31,6 32.4,6 33.8,6 35.2,6 36.6,6 38,6 29.65,6.1 39.4,6.1 31.7,6.7 33.1,6.7 34.5,6.7 35.9,6.7 37.3,6.7 28.9,6.85 40.15,6.85 31.1,7.4 32.4,7.4 33.8,7.4 35.2,7.4 36.6,7.4 37.9,7.4 29.65,7.6 39.4,7.6 31.7,8.1 33.1,8.1 34.5,8.1 35.9,8.1 37.3,8.1 28.9,8.35 30.4,8.35 38.65,8.35 40.15,8.35 32.4,8.8 33.8,8.8 35.2,8.8 36.6,8.8 29.65,9.1 31.15,9.1 37.9,9.1 39.4,9.1 33.1,9.4 35.9,9.4 34.5,9.5 28.9,9.85 30.4,9.85 31.9,9.85 37.15,9.85 38.65,9.85 40.15,9.85 29.246,10.681 30.746,10.681 32.246,10.681 33.746,10.681 35.215,10.681 36.715,10.681 38.215,10.681 39.715,10.681 29.996,11.431 31.496,11.431 32.996,11.431 35.965,11.431 37.465,11.431 38.965,11.431 29.246,12.181 30.746,12.181 32.246,12.181 33.746,12.181 35.215,12.181 36.715,12.181 38.215,12.181 39.715,12.181 29.996,12.931 31.496,12.931 32.996,12.931 35.965,12.931 37.465,12.931 38.965,12.931 29.246,13.681 30.746,13.681 32.246,13.681 33.746,13.681 35.215,13.681 36.715,13.681 38.215,13.681 39.715,13.681
PHC: J1.6 R9.1 R12.1 TP3.1 | length 12.7
  Top Layer w0.254: J1.6 51.976,15.865 cw(c51.976,15.103) 52.514,15.642 52.924,15.232 cw(c52.385,14.694) 53.147,14.694 53.147,12.131 ; TP3.1@54.95,6.1 54.95,6.05 v1(56.4,4.6)
  other v1: 47.45,2.35 48.95,2.35 50.45,2.35 55.7,2.35 57.2,2.35 58.7,2.35 53,2.5 51.6,2.6 54.4,2.6 48.2,3.1 49.7,3.1 56.45,3.1 57.95,3.1 50.9,3.2 52.3,3.2 53.7,3.2 55.1,3.2 47.45,3.85 48.95,3.85 57.2,3.85 58.7,3.85 50.2,3.9 51.6,3.9 53,3.9 54.4,3.9 55.8,3.9 48.2,4.6 49.6,4.6 50.9,4.6 52.3,4.6 53.7,4.6 55.1,4.6 57.95,4.6 50.2,5.3 51.6,5.3 53,5.3 54.4,5.3 55.8,5.3 47.45,5.35 58.7,5.35 49.5,6 50.9,6 52.3,6 53.7,6 55.1,6 56.5,6 48.2,6.1 57.95,6.1 50.2,6.7 51.6,6.7 53,6.7 54.4,6.7 55.8,6.7 47.45,6.85 58.7,6.85 49.6,7.4 50.9,7.4 52.3,7.4 53.7,7.4 55.1,7.4 56.4,7.4 48.2,7.6 57.95,7.6 50.2,8.1 51.6,8.1 53,8.1 54.4,8.1 55.8,8.1 47.45,8.35 48.95,8.35 57.2,8.35 58.7,8.35 50.9,8.8 52.3,8.8 53.7,8.8 55.1,8.8 48.2,9.1 49.7,9.1 56.45,9.1 57.95,9.1 51.6,9.4 54.4,9.4 53,9.5 47.45,9.85 48.95,9.85 50.45,9.85 55.7,9.85 57.2,9.85 58.7,9.85 47.897,10.681 49.397,10.681 50.897,10.681 52.397,10.681 53.897,10.681 55.397,10.681 56.897,10.681 58.397,10.681 48.647,11.431 50.147,11.431 51.647,11.431 54.647,11.431 56.147,11.431 57.647,11.431 47.897,12.181 49.397,12.181 50.897,12.181 52.397,12.181 53.897,12.181 55.397,12.181 56.897,12.181 58.397,12.181 48.647,12.931 50.147,12.931 51.647,12.931 54.647,12.931 56.147,12.931 57.647,12.931 47.897,13.681 49.397,13.681 50.897,13.681 52.397,13.681 53.897,13.681 55.397,13.681 56.897,13.681 58.397,13.681
SHA: J2.3 Q1.3 Q4.2 R4.1 R7.2 R10.2 | length 12.6
  Top Layer w0.254: 15.938,21.109 15.938,18.032 ccw(c16.7,18.032) 16.161,17.494 16.297,17.358 ccw(c16.836,17.897) 16.836,17.135 J2.3 ; 21.15,35.247 R4.1
  other v1: 10.686,19.681 12.186,19.681 13.686,19.681 15.186,19.681 16.686,19.681 18.186,19.681 19.686,19.681 21.186,19.681 11.436,20.431 12.936,20.431 14.436,20.431 17.436,20.431 18.936,20.431 20.436,20.431 10.686,21.181 12.186,21.181 13.686,21.181 15.186,21.181 16.686,21.181 18.186,21.181 19.686,21.181 21.186,21.181 11.436,21.931 12.936,21.931 14.436,21.931 17.436,21.931 18.936,21.931 20.436,21.931 10.686,22.681 12.186,22.681 13.686,22.681 15.186,22.681 16.686,22.681 18.186,22.681 19.686,22.681 21.186,22.681 13.622,23.948 15.122,23.948 16.622,23.948 18.122,23.948 19.622,23.948 21.122,23.948 14.372,24.698 15.872,24.698 17.372,24.698 18.872,24.698 20.372,24.698 13.622,25.448 15.122,25.448 16.622,25.448 18.122,25.448 19.622,25.448 21.122,25.448 14.372,26.198 15.872,26.198 17.372,26.198 18.872,26.198 20.372,26.198 13.622,26.948 15.122,26.948 16.622,26.948 18.122,26.948 19.622,26.948 21.122,26.948 14.372,27.698 15.872,27.698 17.372,27.698 18.872,27.698 20.372,27.698 13.622,28.448 15.122,28.448 16.622,28.448 18.122,28.448 19.622,28.448 21.122,28.448 14.372,29.198 15.872,29.198 17.372,29.198 18.872,29.198 20.372,29.198 13.622,29.948 15.122,29.948 16.622,29.948 18.122,29.948 19.622,29.948 21.122,29.948 14.372,30.698 15.872,30.698 17.372,30.698 18.872,30.698 20.372,30.698 13.622,31.448 15.122,31.448 16.622,31.448 18.122,31.448 19.622,31.448 21.122,31.448 14.372,32.198 15.872,32.198 17.372,32.198 18.872,32.198 20.372,32.198 13.622,32.948 15.122,32.948 16.622,32.948 18.122,32.948 19.622,32.948 21.122,32.948
SHB: J2.4 Q2.3 Q5.2 R5.1 R8.2 R11.2 | length 12.6
  Top Layer w0.254: J2.4 33.329,17.135 ccw(c33.329,17.897) 33.868,17.358 34.257,17.747 ccw(c33.718,18.286) 34.48,18.286 34.48,21.463 ; 39.937,35.247 R5.1
  other v1: 29.246,19.681 30.746,19.681 32.246,19.681 33.746,19.681 35.215,19.681 36.715,19.681 38.215,19.681 39.715,19.681 29.996,20.431 31.496,20.431 32.996,20.431 35.965,20.431 37.465,20.431 38.965,20.431 29.246,21.181 30.746,21.181 32.246,21.181 33.746,21.181 35.215,21.181 36.715,21.181 38.215,21.181 39.715,21.181 29.996,21.931 31.496,21.931 32.996,21.931 35.965,21.931 37.465,21.931 38.965,21.931 29.246,22.681 30.746,22.681 32.246,22.681 33.746,22.681 35.215,22.681 36.715,22.681 38.215,22.681 39.715,22.681 32.164,23.948 33.664,23.948 35.164,23.948 36.664,23.948 38.164,23.948 39.664,23.948 32.914,24.698 34.414,24.698 35.914,24.698 37.414,24.698 38.914,24.698 32.164,25.448 33.664,25.448 35.164,25.448 36.664,25.448 38.164,25.448 39.664,25.448 32.914,26.198 34.414,26.198 35.914,26.198 37.414,26.198 38.914,26.198 32.164,26.948 33.664,26.948 35.164,26.948 36.664,26.948 38.164,26.948 39.664,26.948 32.914,27.698 34.414,27.698 35.914,27.698 37.414,27.698 38.914,27.698 32.164,28.448 33.664,28.448 35.164,28.448 36.664,28.448 38.164,28.448 39.664,28.448 32.914,29.198 34.414,29.198 35.914,29.198 37.414,29.198 38.914,29.198 32.164,29.948 33.664,29.948 35.164,29.948 36.664,29.948 38.164,29.948 39.664,29.948 32.914,30.698 34.414,30.698 35.914,30.698 37.414,30.698 38.914,30.698 32.164,31.448 33.664,31.448 35.164,31.448 36.664,31.448 38.164,31.448 39.664,31.448 32.914,32.198 34.414,32.198 35.914,32.198 37.414,32.198 38.914,32.198 32.164,32.948 33.664,32.948 35.164,32.948 36.664,32.948 38.164,32.948 39.664,32.948
SHC: J1.4 Q3.3 Q6.2 R6.1 R9.2 R12.2 | length 15.5
  Top Layer w0.254: J1.4 51.997,17.135 ccw(c51.997,17.897) 52.535,17.358 52.924,17.747 ccw(c52.385,18.285) 53.147,18.285 53.147,21.108 ; R6.1 46.228,32.788 46.377,32.639 Q6.2@48.387,32.639
  other v1: 47.897,19.681 49.397,19.681 50.897,19.681 52.397,19.681 53.897,19.681 55.397,19.681 56.897,19.681 58.397,19.681 48.647,20.431 50.147,20.431 51.647,20.431 54.647,20.431 56.147,20.431 57.647,20.431 47.897,21.181 49.397,21.181 50.897,21.181 52.397,21.181 53.897,21.181 55.397,21.181 56.897,21.181 58.397,21.181 48.647,21.931 50.147,21.931 51.647,21.931 54.647,21.931 56.147,21.931 57.647,21.931 47.897,22.681 49.397,22.681 50.897,22.681 52.397,22.681 53.897,22.681 55.397,22.681 56.897,22.681 58.397,22.681 48.05,23.948 49.55,23.948 51.05,23.948 52.55,23.948 54.05,23.948 55.55,23.948 48.8,24.698 50.3,24.698 51.8,24.698 53.3,24.698 54.8,24.698 48.05,25.448 49.55,25.448 51.05,25.448 52.55,25.448 54.05,25.448 55.55,25.448 48.8,26.198 50.3,26.198 51.8,26.198 53.3,26.198 54.8,26.198 48.05,26.948 49.55,26.948 51.05,26.948 52.55,26.948 54.05,26.948 55.55,26.948 48.8,27.698 50.3,27.698 51.8,27.698 53.3,27.698 54.8,27.698 48.05,28.448 49.55,28.448 51.05,28.448 52.55,28.448 54.05,28.448 55.55,28.448 48.8,29.198 50.3,29.198 51.8,29.198 53.3,29.198 54.8,29.198 48.05,29.948 49.55,29.948 51.05,29.948 52.55,29.948 54.05,29.948 55.55,29.948 48.8,30.698 50.3,30.698 51.8,30.698 53.3,30.698 54.8,30.698 48.05,31.448 49.55,31.448 51.05,31.448 52.55,31.448 54.05,31.448 55.55,31.448 48.8,32.198 50.3,32.198 51.8,32.198 53.3,32.198 54.8,32.198 48.05,32.948 49.55,32.948 51.05,32.948 52.55,32.948 54.05,32.948 55.55,32.948
VIN: C1.2 C2.2 C3.2 C4.2 C5.2 C6.2 C7.2 C8.2 C9.2 C10.2 C11.2 C13.2 C14.2 C15.2 C16.2 J1.3 Q1.2 Q2.2 Q3.2 TP4.1 | length 23.2
  Top Layer w0.406: J1.3 42.797,17.302 42.805,17.302 ccw(c42.789,17.708) 43.076,17.42 43.379,17.724 ccw(c43.091,18.011) 43.497,18.011 43.497,38.534 ccw(c43.091,38.534) 43.379,38.821 43.2,39
  other v1: 59.25,33.806 60.437,33.806 65.308,33.82 66.558,33.831 59.788,34.457 63,34.5 66,34.5 61.6,34.6 64.4,34.6 60.9,35.2 62.3,35.2 63.7,35.2 65.1,35.2 66.657,35.2 59.25,35.25 60.2,35.9 61.6,35.9 63,35.9 64.4,35.9 65.8,35.9 59.6,36.6 60.9,36.6 62.3,36.6 63.7,36.6 65.1,36.6 66.4,36.6 60.2,37.3 61.6,37.3 63,37.3 64.4,37.3 65.8,37.3 59.5,38 60.9,38 62.3,38 63.7,38 65.1,38 66.5,38 60.2,38.7 61.6,38.7 63,38.7 64.4,38.7 65.8,38.7 22.2,39 23.7,39 25.2,39 26.7,39 28.2,39 40.95,39 42.45,39 43.95,39 45.45,39 46.95,39 59.6,39.4 60.9,39.4 62.3,39.4 63.7,39.4 65.1,39.4 66.4,39.4 11.502,39.5 13.002,39.5 14.502,39.5 16.002,39.5 17.502,39.5 19.002,39.5 20.502,39.5 30.044,39.5 31.544,39.5 33.044,39.5 34.544,39.5 36.044,39.5 37.544,39.5 39.044,39.5 48.713,39.5 50.213,39.5 51.713,39.5 53.213,39.5 54.713,39.5 56.213,39.5 57.713,39.5 21.45,39.75 22.95,39.75 24.45,39.75 25.95,39.75 27.45,39.75 28.95,39.75 40.2,39.75 41.7,39.75 43.2,39.75 44.7,39.75 46.2,39.75 47.7,39.75 58.73,40.1 60.2,40.1 61.6,40.1 63,40.1 64.4,40.1 65.8,40.1 12.252,40.25 13.752,40.25 15.252,40.25 16.752,40.25 18.252,40.25 19.752,40.25 30.794,40.25 32.294,40.25 33.794,40.25 35.294,40.25 36.794,40.25 38.294,40.25 49.463,40.25 50.963,40.25 52.463,40.25 53.963,40.25 55.463,40.25 56.963,40.25 22.2,40.5 23.7,40.5 25.2,40.5 26.7,40.5 28.2,40.5 40.95,40.5 42.45,40.5 43.95,40.5 45.45,40.5 46.95,40.5 66.689,40.5 60.9,40.8 62.3,40.8 63.7,40.8 65.1,40.8 11.502,41 13.002,41 14.502,41 16.002,41 17.502,41 19.002,41 20.502,41 30.044,41 31.544,41 33.044,41 34.544,41 36.044,41 37.544,41 39.044,41 48.713,41 50.213,41 51.713,41 53.213,41 54.713,41 56.213,41 57.713,41 59.43,41 21.45,41.25 22.95,41.25 24.45,41.25 25.95,41.25 27.45,41.25 28.95,41.25 40.2,41.25 41.7,41.25 43.2,41.25 44.7,41.25 46.2,41.25 47.7,41.25 61.6,41.4 64.4,41.4 58.626,41.5 63,41.5 65.8,41.626 66.689,41.626 12.252,41.75 13.752,41.75 15.252,41.75 16.752,41.75 18.252,41.75 19.752,41.75 30.794,41.75 32.294,41.75 33.794,41.75 35.294,41.75 36.794,41.75 38.294,41.75 49.463,41.75 50.963,41.75 52.463,41.75 53.963,41.75 55.463,41.75 56.963,41.75 60.14,41.75 22.2,42 23.7,42 25.2,42 26.7,42 28.2,42 40.95,42 42.45,42 43.95,42 45.45,42 46.95,42 59.239,42.229 11.502,42.5 13.002,42.5 14.502,42.5 16.002,42.5 17.502,42.5 19.002,42.5 20.502,42.5 30.044,42.5 31.544,42.5 33.044,42.5 34.544,42.5 36.044,42.5 37.544,42.5 39.044,42.5 48.713,42.5 50.213,42.5 51.713,42.5 53.213,42.5 54.713,42.5 56.213,42.5 57.713,42.5 21.45,42.75 22.95,42.75 24.45,42.75 25.95,42.75 27.45,42.75 28.95,42.75 40.2,42.75 41.7,42.75 43.2,42.75 44.7,42.75 46.2,42.75 47.7,42.75 58.669,42.996 12.252,43.25 13.752,43.25 15.252,43.25 16.752,43.25 18.252,43.25 19.752,43.25 30.794,43.25 32.294,43.25 33.794,43.25 35.294,43.25 36.794,43.25 38.294,43.25 49.463,43.25 50.963,43.25 52.463,43.25 53.963,43.25 55.463,43.25 56.963,43.25 22.2,43.5 23.7,43.5 25.2,43.5 26.7,43.5 28.2,43.5 40.95,43.5 42.45,43.5 43.95,43.5 45.45,43.5 46.95,43.5 11.502,44 13.002,44 14.502,44 16.002,44 17.502,44 19.002,44 20.502,44 30.044,44 31.544,44 33.044,44 34.544,44 36.044,44 37.544,44 39.044,44 48.713,44 50.213,44 51.713,44 53.213,44 54.713,44 56.213,44 57.713,44 21.45,44.25 22.95,44.25 24.45,44.25 25.95,44.25 27.45,44.25 28.95,44.25 40.2,44.25 41.7,44.25 43.2,44.25 44.7,44.25 46.2,44.25 47.7,44.25 12.252,44.75 13.752,44.75 15.252,44.75 16.752,44.75 18.252,44.75 19.752,44.75 30.794,44.75 32.294,44.75 33.794,44.75 35.294,44.75 36.794,44.75 38.294,44.75 49.463,44.75 50.963,44.75 52.463,44.75 53.963,44.75 55.463,44.75 56.963,44.75 22.2,45 23.7,45 25.2,45 26.7,45 28.2,45 40.95,45 42.45,45 43.95,45 45.45,45 46.95,45 11.502,45.5 13.002,45.5 14.502,45.5 16.002,45.5 17.502,45.5 19.002,45.5 20.502,45.5 30.044,45.5 31.544,45.5 33.044,45.5 34.544,45.5 36.044,45.5 37.544,45.5 39.044,45.5 48.713,45.5 50.213,45.5 51.713,45.5 53.213,45.5 54.713,45.5 56.213,45.5 57.713,45.5 21.45,45.75 22.95,45.75 24.45,45.75 25.95,45.75 27.45,45.75 28.95,45.75 40.2,45.75 41.7,45.75 43.2,45.75 44.7,45.75 46.2,45.75 47.7,45.75 12.252,46.25 13.752,46.25 15.252,46.25 16.752,46.25 18.252,46.25 19.752,46.25 30.794,46.25 32.294,46.25 33.794,46.25 35.294,46.25 36.794,46.25 38.294,46.25 49.463,46.25 50.963,46.25 52.463,46.25 53.963,46.25 55.463,46.25 56.963,46.25 22.2,46.5 23.7,46.5 25.2,46.5 26.7,46.5 28.2,46.5 40.95,46.5 42.45,46.5 43.95,46.5 45.45,46.5 46.95,46.5 11.502,47 13.002,47 14.502,47 16.002,47 17.502,47 19.002,47 20.502,47 30.044,47 31.544,47 33.044,47 34.544,47 36.044,47 37.544,47 39.044,47 48.713,47 50.213,47 51.713,47 53.213,47 54.713,47 56.213,47 57.713,47 21.45,47.25 22.95,47.25 24.45,47.25 25.95,47.25 27.45,47.25 28.95,47.25 40.2,47.25 41.7,47.25 43.2,47.25 44.7,47.25 46.2,47.25 47.7,47.25
pads on no net: TP6.1 TP7.1 TP8.1 TP9.1

## Polygon pours and split planes (outlines as drawn)
GND on Top Layer "GND_L01_P022" (solid, remove dead copper, pour order 22): 0,2 ccw(c2,2) 2,0 67,0 ccw(c67,2) 69,2 69,52 ccw(c67,52) 67,54 2,54 ccw(c2,52) 0,52
SHC on Top Layer "SHC_L01_P018" (solid, pour order 18): 57.912,36.703 57.912,34.597 cw(c56.866,34.596) 57.605,33.856 ccw(c58.091,33.37) 57.404,33.37 57.404,24.257 ccw(c58.42,24.257) 58.42,23.241 58.801,23.241 cw(c58.801,22.987) 59.055,22.987 59.055,19.558 cw(c58.674,19.558) 58.674,19.177 45.593,19.177 cw(c45.593,19.558) 45.212,19.558 45.212,33.655 cw(c45.593,33.655) 45.593,34.036 49.276,34.036 ccw(c49.276,34.417) 49.657,34.417 49.657,36.703 cw(c49.911,36.703) 49.911,36.957 57.658,36.957 cw(c57.658,36.703)
SHB on Top Layer "SHB_L01_P011" (solid, pour order 11): 31.203,37.084 41.826,37.084 cw(c41.826,36.429) 42.481,36.429 42.481,19.748 cw(c41.851,19.748) 41.851,19.118 28.546,19.118 cw(c28.546,19.371) 28.292,19.372 28.292,22.807 cw(c28.667,22.807) 28.667,23.182 30.705,23.182 ccw(c30.705,23.436) 30.959,23.436 30.959,36.84 cw(c31.203,36.84)
SHA on Top Layer "SHA_L01_P010" (solid, pour order 10): 11.303,37.016 21.657,37.016 cw(c21.658,36.703) 21.971,36.703 21.971,19.314 cw(c21.707,19.314) 21.707,19.05 10.033,19.05 cw(c10.033,19.304) 9.779,19.304 9.779,22.739 cw(c10.154,22.739) 10.154,23.114 11.049,23.114 ccw(c11.049,23.368) 11.303,23.368
PHA on Top Layer "PHA_L01_P015" (solid, pour order 15): 10.44,14.26 21.432,14.26 cw(c21.432,13.721) 21.971,13.721 21.971,2.54 cw(c21.209,2.54) 21.209,1.778 10.668,1.778 cw(c10.668,2.54) 9.906,2.54 9.906,13.726 cw(c10.44,13.726)
PHB on Top Layer "PHB_L01_P016" (solid, pour order 16): 29,14.26 39.961,14.26 cw(c39.961,13.644) 40.576,13.645 40.576,2.618 cw(c39.815,2.618) 39.814,1.856 29.273,1.856 cw(c29.273,2.618) 28.511,2.618 28.511,13.772 cw(c29,13.772)
PHC on Top Layer "PHC_L01_P017" (solid, pour order 17): 47.651,14.26 58.643,14.26 cw(c58.643,13.785) 59.118,13.785 59.118,2.618 cw(c58.357,2.618) 58.356,1.856 47.816,1.856 cw(c47.815,2.618) 47.053,2.618 47.053,13.662 cw(c47.651,13.662)
VIN on Top Layer "VIN_L01_P009" (solid, pour order 9): 67.183,34.163 67.183,41.402 ccw(c66.415,41.402) 66.415,42.17 61.589,42.17 cw(c61.934,48.106) 60.487,42.339 cw(c61.133,44.914) 58.645,43.989 cw(c64.723,46.249) 58.25,45.853 55.505,45.853 55.378,45.726 55.378,39.122 55.67,38.831 ccw(c56.193,39.355) 56.193,38.614 57.209,38.614 cw(c57.209,38.029) 57.623,38.443 58.329,37.737 cw(c57.362,36.77) 58.73,36.77 58.73,33.726 ccw(c59.176,33.726) 59.176,33.28 66.3,33.28 ccw(c66.3,34.163)
VIN on Top Layer "VIN_L01_P003" (solid, pour order 3): 10.419,38.608 10.419,50.165 58.669,50.165 58.669,38.608
GND on Bottom Layer "GND_L04_P052" (solid, remove dead copper, pour order 52): 0,2 ccw(c2,2) 2,0 67,0 ccw(c67,2) 69,2 69,52 ccw(c67,52) 67,54 2,54 ccw(c2,52) 0,52
PHA on Bottom Layer "PHA_L04_P043" (solid, pour order 43): 9.75,2.594 ccw(c10.844,2.594) 10.844,1.5 21.5,1.5 ccw(c21.5,2.5) 22.5,2.5 22.5,13 ccw(c21.5,13) 21.5,14 10.94,14 10.748,14 ccw(c10.748,13.002) 9.75,13.002
PHC on Bottom Layer "PHC_L04_P045" (solid, pour order 45): 58.235,1.5 ccw(c58.235,2.515) 59.25,2.515 59.25,12.985 ccw(c58.235,12.985) 58.235,14 47.5,14 ccw(c47.5,13) 46.5,13 46.5,2.5 ccw(c47.5,2.5) 47.5,1.5
VIN on Bottom Layer "VIN_L04_P049" (solid, pour order 49): 67.183,34.163 67.183,41.402 ccw(c66.415,41.402) 66.415,42.17 61.589,42.17 cw(c61.934,48.106) 60.487,42.339 cw(c61.133,44.914) 58.645,43.989 cw(c64.723,46.249) 58.25,45.853 55.505,45.853 55.378,45.726 55.378,39.122 55.67,38.831 ccw(c56.193,39.355) 56.193,38.614 57.209,38.614 cw(c57.209,38.029) 57.623,38.443 58.329,37.737 cw(c57.362,36.77) 58.73,36.77 58.73,33.726 ccw(c59.176,33.726) 59.176,33.28 66.3,33.28 ccw(c66.3,34.163)
SHC on Bottom Layer "SHC_L04_P048" (solid, pour order 48): 59.5,20 59.5,22.5 ccw(c58.5,22.5) 58.5,23.5 57.5,23.5 cw(c57.5,24.5) 56.5,24.5 56.5,33 ccw(c55.5,33) 55.5,34 48,34 ccw(c48,33) 47,33 47,20 ccw(c48,20) 48,19 58.5,19 ccw(c58.5,20)
SHB on Bottom Layer "SHB_L04_P047" (solid, pour order 47): 28.25,20 28.25,22.5 cw(c29.25,22.5) 29.25,23.5 30.25,23.5 ccw(c30.25,24.5) 31.25,24.5 31.25,33 cw(c32.25,33) 32.25,34 39.75,34 cw(c39.75,33) 40.75,33 40.75,20 cw(c39.75,20) 39.75,19 29.25,19 cw(c29.25,20)
SHA on Bottom Layer "SHA_L04_P046" (solid, pour order 46): 9.5,20 9.5,22.5 cw(c10.5,22.5) 10.5,23.5 11.5,23.5 ccw(c11.5,24.5) 12.5,24.5 12.5,33 cw(c13.5,33) 13.5,34 21,34 cw(c21,33) 22,33 22,20 cw(c21,20) 21,19 10.5,19 cw(c10.5,20)
PHB on Bottom Layer "PHB_L04_P044" (solid, pour order 44): 41,2.5 41,13 ccw(c40,13) 40,14 29,14 ccw(c29,13) 28,13 28,2.5 ccw(c29,2.5) 29,1.5 40,1.5 ccw(c40,2.5)
VIN on Bottom Layer "VIN_L04_P026" (solid, pour order 26): 11,38.5 58,38.5 ccw(c58,39.5) 59,39.5 59,47 ccw(c58.2,47) 58.2,47.8 10.8,47.8 ccw(c10.8,47) 10,47 10,39.5 ccw(c11,39.5)
GND on Layer 1 "GND_L02_P050" (solid, pour order 50): 0,2 ccw(c2,2) 2,0 67,0 ccw(c67,2) 69,2 69,52 ccw(c67,52) 67,54 2,54 ccw(c2,52) 0,52
PHA on Layer 1 "PHA_L02_P027" (solid, pour order 27): 22.5,2.5 22.5,13 ccw(c21.5,13) 21.5,14 9.734,14 9.734,1.5 21.5,1.5 ccw(c21.5,2.5)
SHA on Layer 1 "SHA_L02_P024" (solid, pour order 24): 9.5,20 9.5,22.5 cw(c10.5,22.5) 10.5,23.5 11.5,23.5 ccw(c11.5,24.5) 12.5,24.5 12.5,33 cw(c13.5,33) 13.5,34 21,34 cw(c21,33) 22,33 22,20 cw(c21,20) 21,19 10.5,19 cw(c10.5,20)
VIN on Layer 1 "VIN_L02_P033" (solid, pour order 33): 67.183,34.163 67.183,41.402 ccw(c66.415,41.402) 66.415,42.17 61.589,42.17 cw(c61.934,48.106) 60.487,42.339 cw(c61.133,44.914) 58.645,43.989 cw(c64.723,46.249) 58.25,45.853 55.505,45.853 55.378,45.726 55.378,39.122 55.67,38.831 ccw(c56.193,39.355) 56.193,38.614 57.209,38.614 cw(c57.209,38.029) 57.623,38.443 58.329,37.737 cw(c57.362,36.77) 58.73,36.77 58.73,33.726 ccw(c59.176,33.726) 59.176,33.28 66.3,33.28 ccw(c66.3,34.163)
PHB on Layer 1 "PHB_L02_P031" (solid, pour order 31): 41,2.5 41,13 ccw(c40,13) 40,14 29,14 ccw(c29,13) 28,13 28,2.5 ccw(c29,2.5) 29,1.5 40,1.5 ccw(c40,2.5)
PHC on Layer 1 "PHC_L02_P032" (solid, pour order 32): 59.339,1.5 59.339,14 47.5,14 ccw(c47.5,13) 46.5,13 46.5,2.5 ccw(c47.5,2.5) 47.5,1.5
SHC on Layer 1 "SHC_L02_P029" (solid, pour order 29): 59.5,20 59.5,22.5 ccw(c58.5,22.5) 58.5,23.5 57.5,23.5 cw(c57.5,24.5) 56.5,24.5 56.5,33 ccw(c55.5,33) 55.5,34 48,34 ccw(c48,33) 47,33 47,20 ccw(c48,20) 48,19 58.5,19 ccw(c58.5,20)
SHB on Layer 1 "SHB_L02_P028" (solid, pour order 28): 28.25,20 28.25,22.5 cw(c29.25,22.5) 29.25,23.5 30.25,23.5 ccw(c30.25,24.5) 31.25,24.5 31.25,33 cw(c32.25,33) 32.25,34 39.75,34 cw(c39.75,33) 40.75,33 40.75,20 cw(c39.75,20) 39.75,19 29.25,19 cw(c29.25,20)
VIN on Layer 1 "VIN_L02_P021" (solid, pour order 21): 11,38.5 58,38.5 ccw(c58,39.5) 59,39.5 59,47 ccw(c58.2,47) 58.2,47.8 10.8,47.8 ccw(c10.8,47) 10,47 10,39.5 ccw(c11,39.5)
GND on Layer 2 "GND_L03_P051" (solid, pour order 51): 0,2 ccw(c2,2) 2,0 67,0 ccw(c67,2) 69,2 69,52 ccw(c67,52) 67,54 2,54 ccw(c2,52) 0,52
VIN on Layer 2 "VIN_L03_P042" (solid, pour order 42): 67.183,34.163 67.183,41.402 ccw(c66.415,41.402) 66.415,42.17 61.589,42.17 cw(c61.934,48.106) 60.487,42.339 cw(c61.133,44.914) 58.645,43.989 cw(c64.723,46.249) 58.25,45.853 55.505,45.853 55.378,45.726 55.378,39.122 55.67,38.831 ccw(c56.193,39.355) 56.193,38.614 57.209,38.614 cw(c57.209,38.029) 57.623,38.443 58.329,37.737 cw(c57.362,36.77) 58.73,36.77 58.73,33.726 ccw(c59.176,33.726) 59.176,33.28 66.3,33.28 ccw(c66.3,34.163)
VIN on Layer 2 "VIN_L03_P041" (solid, pour order 41): 11,38.5 58,38.5 ccw(c58,39.5) 59,39.5 59,47 ccw(c58.2,47) 58.2,47.8 10.8,47.8 ccw(c10.8,47) 10,47 10,39.5 ccw(c11,39.5)
SHA on Layer 2 "SHA_L03_P040" (solid, pour order 40): 9.5,20 9.5,22.5 cw(c10.5,22.5) 10.5,23.5 11.5,23.5 ccw(c11.5,24.5) 12.5,24.5 12.5,33 cw(c13.5,33) 13.5,34 21,34 cw(c21,33) 22,33 22,20 cw(c21,20) 21,19 10.5,19 cw(c10.5,20)
SHC on Layer 2 "SHC_L03_P039" (solid, pour order 39): 59.5,20 59.5,22.5 ccw(c58.5,22.5) 58.5,23.5 57.5,23.5 cw(c57.5,24.5) 56.5,24.5 56.5,33 ccw(c55.5,33) 55.5,34 48,34 ccw(c48,33) 47,33 47,20 ccw(c48,20) 48,19 58.5,19 ccw(c58.5,20)
SHB on Layer 2 "SHB_L03_P038" (solid, pour order 38): 28.25,20 28.25,22.5 cw(c29.25,22.5) 29.25,23.5 30.25,23.5 ccw(c30.25,24.5) 31.25,24.5 31.25,33 cw(c32.25,33) 32.25,34 39.75,34 cw(c39.75,33) 40.75,33 40.75,20 cw(c39.75,20) 39.75,19 29.25,19 cw(c29.25,20)
PHC on Layer 2 "PHC_L03_P037" (solid, pour order 37): 59.238,1.5 59.238,14 47.5,14 ccw(c47.5,13) 46.5,13 46.5,2.5 ccw(c47.5,2.5) 47.5,1.5
PHB on Layer 2 "PHB_L03_P035" (solid, pour order 35): 41,2.5 41,13 ccw(c40,13) 40,14 29,14 ccw(c29,13) 28,13 28,2.5 ccw(c29,2.5) 29,1.5 40,1.5 ccw(c40,2.5)
PHA on Layer 2 "PHA_L03_P034" (solid, pour order 34): 22.5,2.5 22.5,13 ccw(c21.5,13) 21.5,14 9.749,14 9.749,1.5 21.5,1.5 ccw(c21.5,2.5)
no net on Top Solder "NONET_L-01_P-001" (solid): 10.369,47.744 58.728,47.744 58.728,38.557 10.369,38.557

## Keep-outs
Keep-Out Layer:
  the board outline again, w0.025

## Other copper
Top Layer:
  pour cut-out: 46.438,36.297 48.319,36.251 48.353,34.385 46.634,34.38 46.644,34.568 46.672,35.75 46.164,35.75 46.164,36.03

## Silkscreen, mask and mechanical layers (free items; w line width, h text height)
Top Overlay:
  text "GND" at 1.938,31.889 h1.5
  text "VBAT" at 61.64,31.889 h1.5
  text "REV A" at 1.305,3.141 h1
  text "U" at 22.792,2.297 h5
  text "V" at 41.582,2.297 h5
  text "W" at 59.87,2.297 h5
  text "PS 12/31" at 1.305,1.595 h1
Mechanical 1:
  circle w0.127: c7.3,44.85 r1.5
  circle w0.127: c7.3,9.15 r1.5
  circle w0.127: c61.7,9.15 r1.5
  circle w0.127: c61.7,44.85 r1.5
  lines w0.127: 67,53.944 cw(c67,51.944) 69,51.944 69,1.944 ; 67,54 2,54 ccw(c2,52) 0,52 0,2 ccw(c2,2) 2,0 67,0 ccw(c67,2) 69,2
Mechanical 6:
  lines w0.025: -0.635,0 0.635,0 ; 0,-0.635 0,0.635
Drill Drawing:
  circle w0.254: c3.196,62.104 r0.7
  lines w0.254: 2.496,65.952 3.895,65.952 3.196,64.552 2.496,65.952
  lines w0.381: 1.227,60.459 93.691,60.459 ; 1.227,66.756 93.691,66.756 ; 9.323,57.311 9.323,69.905 ; 17.396,57.311 17.396,69.905 ; 32.028,57.311 32.028,69.905 ; 38.307,57.311 38.307,69.905 ; 47.448,57.311 47.448,69.905 ; 64.745,57.311 64.745,69.905 ; 72.234,57.311 72.234,69.905 ; 82.02,57.311 82.02,69.905 ; 1.227,57.311 93.691,57.311 93.691,69.905 1.227,69.905 1.227,57.311
  text "Symbol" at 3.116,67.701 h1.83
  text "Count" at 10.268,67.701 h1.83
  text "Hole Size" at 18.341,67.701 h1.83
  text "Plated" at 32.973,67.701 h1.83
  text "Hole Type" at 39.251,67.701 h1.83
  text "Drill Layer Pair" at 48.393,67.701 h1.83
  text "Via/Pad" at 65.689,67.701 h1.83
  text "Pad Shape" at 73.179,67.701 h1.83
  text "Template" at 82.964,67.701 h1.83
  text "4" at 10.268,64.552 h1.52
  text "3.200mm (125.98mil)" at 18.341,64.552 h1.52
  text "NPTH" at 32.973,64.552 h1.52
  text "Round" at 39.251,64.552 h1.52
  text "Top Layer - Bottom Layer" at 48.393,64.552 h1.52
  text "Pad" at 65.689,64.552 h1.52
  text "Rounded" at 73.179,64.552 h1.52
  text "c0hn320" at 82.964,64.552 h1.52
  text "1706" at 10.268,61.404 h1.52
  text "0.400mm (15.75mil)" at 18.341,61.404 h1.52
  text "PTH" at 32.973,61.404 h1.52
  text "Round" at 39.251,61.404 h1.52
  text "Top Layer - Bottom Layer" at 48.393,61.404 h1.52
  text "Via" at 65.689,61.404 h1.52
  text "Rounded" at 73.179,61.404 h1.52
  text "v60h40m0mx0" at 82.964,61.404 h1.52
  text "1710 Total" at 10.268,58.255 h1.52

## Text inside footprints (layer, text, board x,y; h text height)
C12: Mechanical 8 "1" at 44.662,10.998 h0.64 r180; Mechanical 8 "2" at 43.262,10.998 h0.64 r180
Q1: Mechanical 8 "2" at 16.764,43.15 h0.64 r180; Mechanical 8 "3" at 16.394,35.05 h0.64 r90; Mechanical 8 "1" at 11.594,35.15 h0.64 r90
Q2: Mechanical 8 "2" at 35.306,43.15 h0.64 r180; Mechanical 8 "3" at 34.936,35.05 h0.64 r90; Mechanical 8 "1" at 30.136,35.15 h0.64 r90
Q3: Mechanical 8 "1" at 48.805,35.15 h0.64 r90; Mechanical 8 "3" at 53.605,35.05 h0.64 r90; Mechanical 8 "2" at 53.975,43.15 h0.64 r180
Q4: Mechanical 8 "2" at 17.272,27.686 h0.64 r90; Mechanical 8 "3" at 9.172,28.056 h0.64; Mechanical 8 "1" at 9.272,32.856 h0.64
Q5: Mechanical 8 "1" at 27.814,32.856 h0.64; Mechanical 8 "3" at 27.714,28.056 h0.64; Mechanical 8 "2" at 35.814,27.686 h0.64 r90
Q6: Mechanical 8 "1" at 59.9,24.04 h0.64 r180; Mechanical 8 "3" at 60,28.84 h0.64 r180; Mechanical 8 "2" at 51.9,29.21 h0.64 r270
R4: Mechanical 8 "1" at 23.06,35.908 h0.64 r90; Mechanical 8 "2" at 23.06,37.508 h0.64 r90
R5: Mechanical 8 "2" at 41.729,37.508 h0.64 r90; Mechanical 8 "1" at 41.729,35.908 h0.64 r90
R6: Mechanical 8 "2" at 46.428,37.508 h0.64 r90; Mechanical 8 "1" at 46.428,35.908 h0.64 r90
R7: Mechanical 8 "1" at 18.528,12.381 h0.64 r90; Mechanical 8 "2" at 18.528,21.381 h0.64 r90
R8: Mechanical 8 "2" at 37.057,21.381 h0.64 r90; Mechanical 8 "1" at 37.057,12.381 h0.64 r90
R9: Mechanical 8 "1" at 55.739,12.381 h0.64 r90; Mechanical 8 "2" at 55.739,21.381 h0.64 r90
R10: Mechanical 8 "2" at 12.528,21.381 h0.64 r90; Mechanical 8 "1" at 12.528,12.381 h0.64 r90
R11: Mechanical 8 "1" at 31.088,12.381 h0.64 r90; Mechanical 8 "2" at 31.088,21.381 h0.64 r90
R12: Mechanical 8 "2" at 49.739,21.381 h0.64 r90; Mechanical 8 "1" at 49.739,12.381 h0.64 r90
R16: Mechanical 8 "2" at 7.2,32.508 h0.64 r90; Mechanical 8 "1" at 7.2,30.908 h0.64 r90
R17: Mechanical 8 "2" at 27.994,34.492 h0.64 r270; Mechanical 8 "1" at 27.994,36.092 h0.64 r270
R18: Mechanical 8 "2" at 62.03,23.511 h0.64 r270; Mechanical 8 "1" at 62.03,25.111 h0.64 r270
R19: Mechanical 8 "1" at 43.596,9.282 h0.64; Mechanical 8 "2" at 45.196,9.282 h0.64
RT1: Mechanical 8 "1" at 43.596,12.227 h0.64; Mechanical 8 "2" at 45.196,12.227 h0.64
TP1: Mechanical 8 "1" at 14.222,6 h0.64
TP2: Mechanical 8 "1" at 32.722,6 h0.64
TP3: Mechanical 8 "1" at 51.222,6 h0.64
TP4: Mechanical 8 "1" at 61.222,38 h0.64
TP5: Mechanical 8 "1" at 4.222,38 h0.64